# EAGLE board CC3000_WiFi_Breakout_Panel_v10 (EAGLE 6.5.0), part 1 of 3
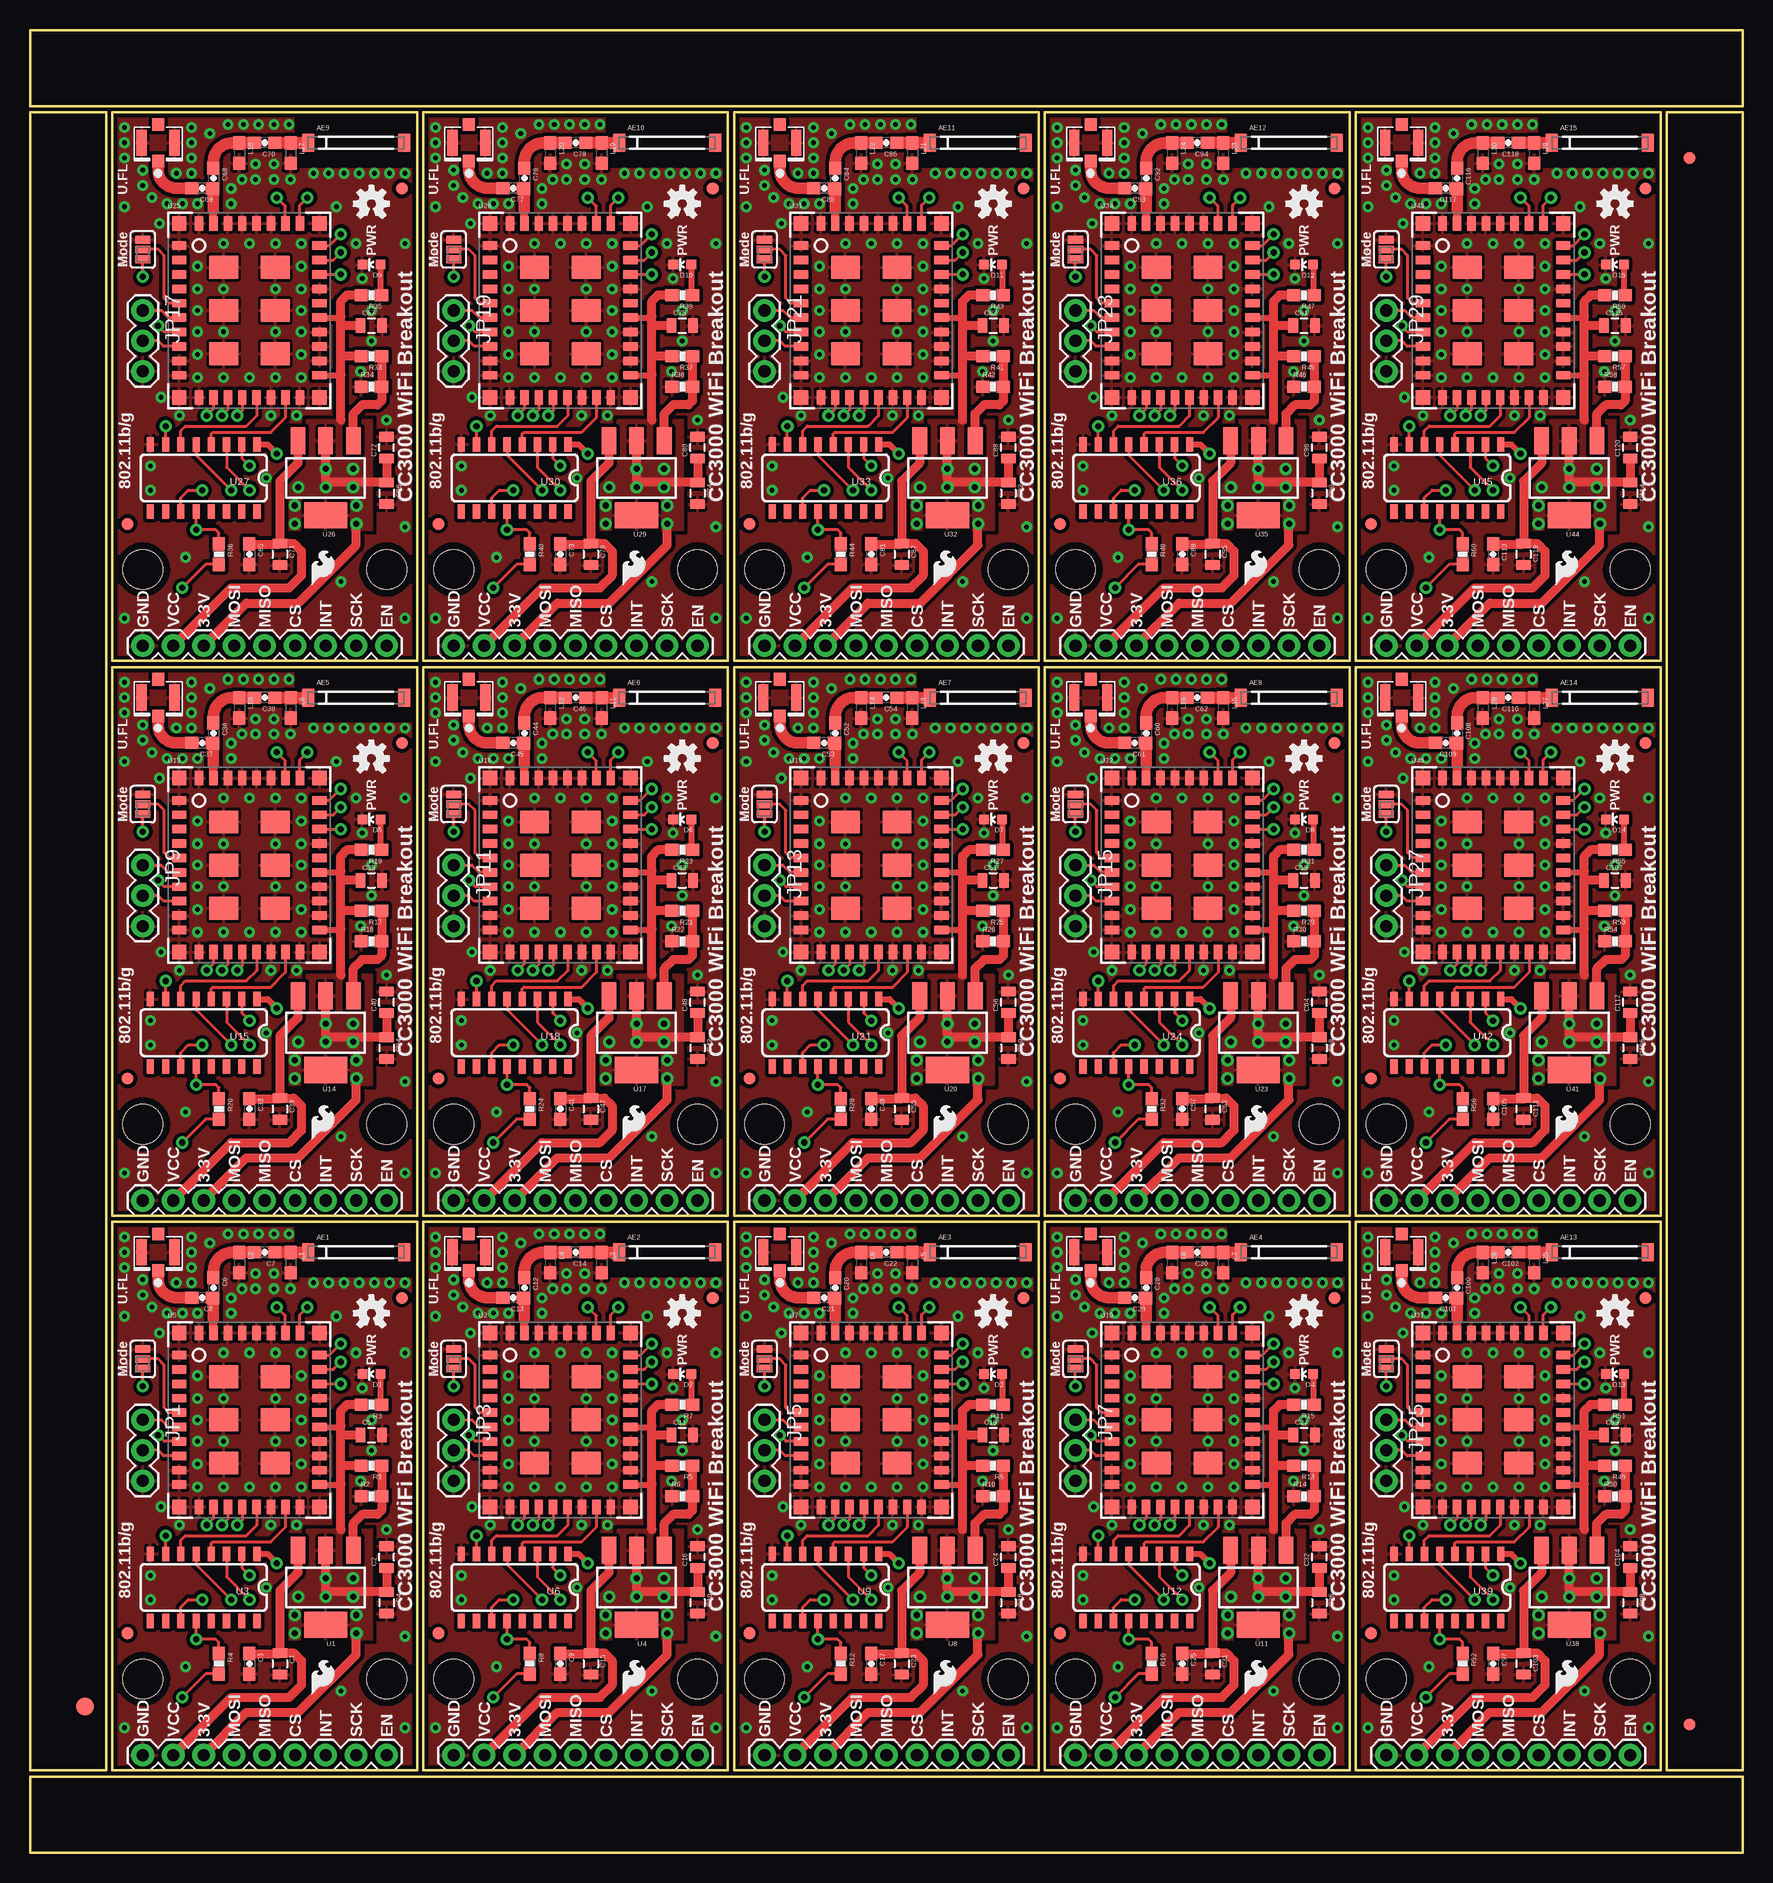
[diagram p0: board, top side]
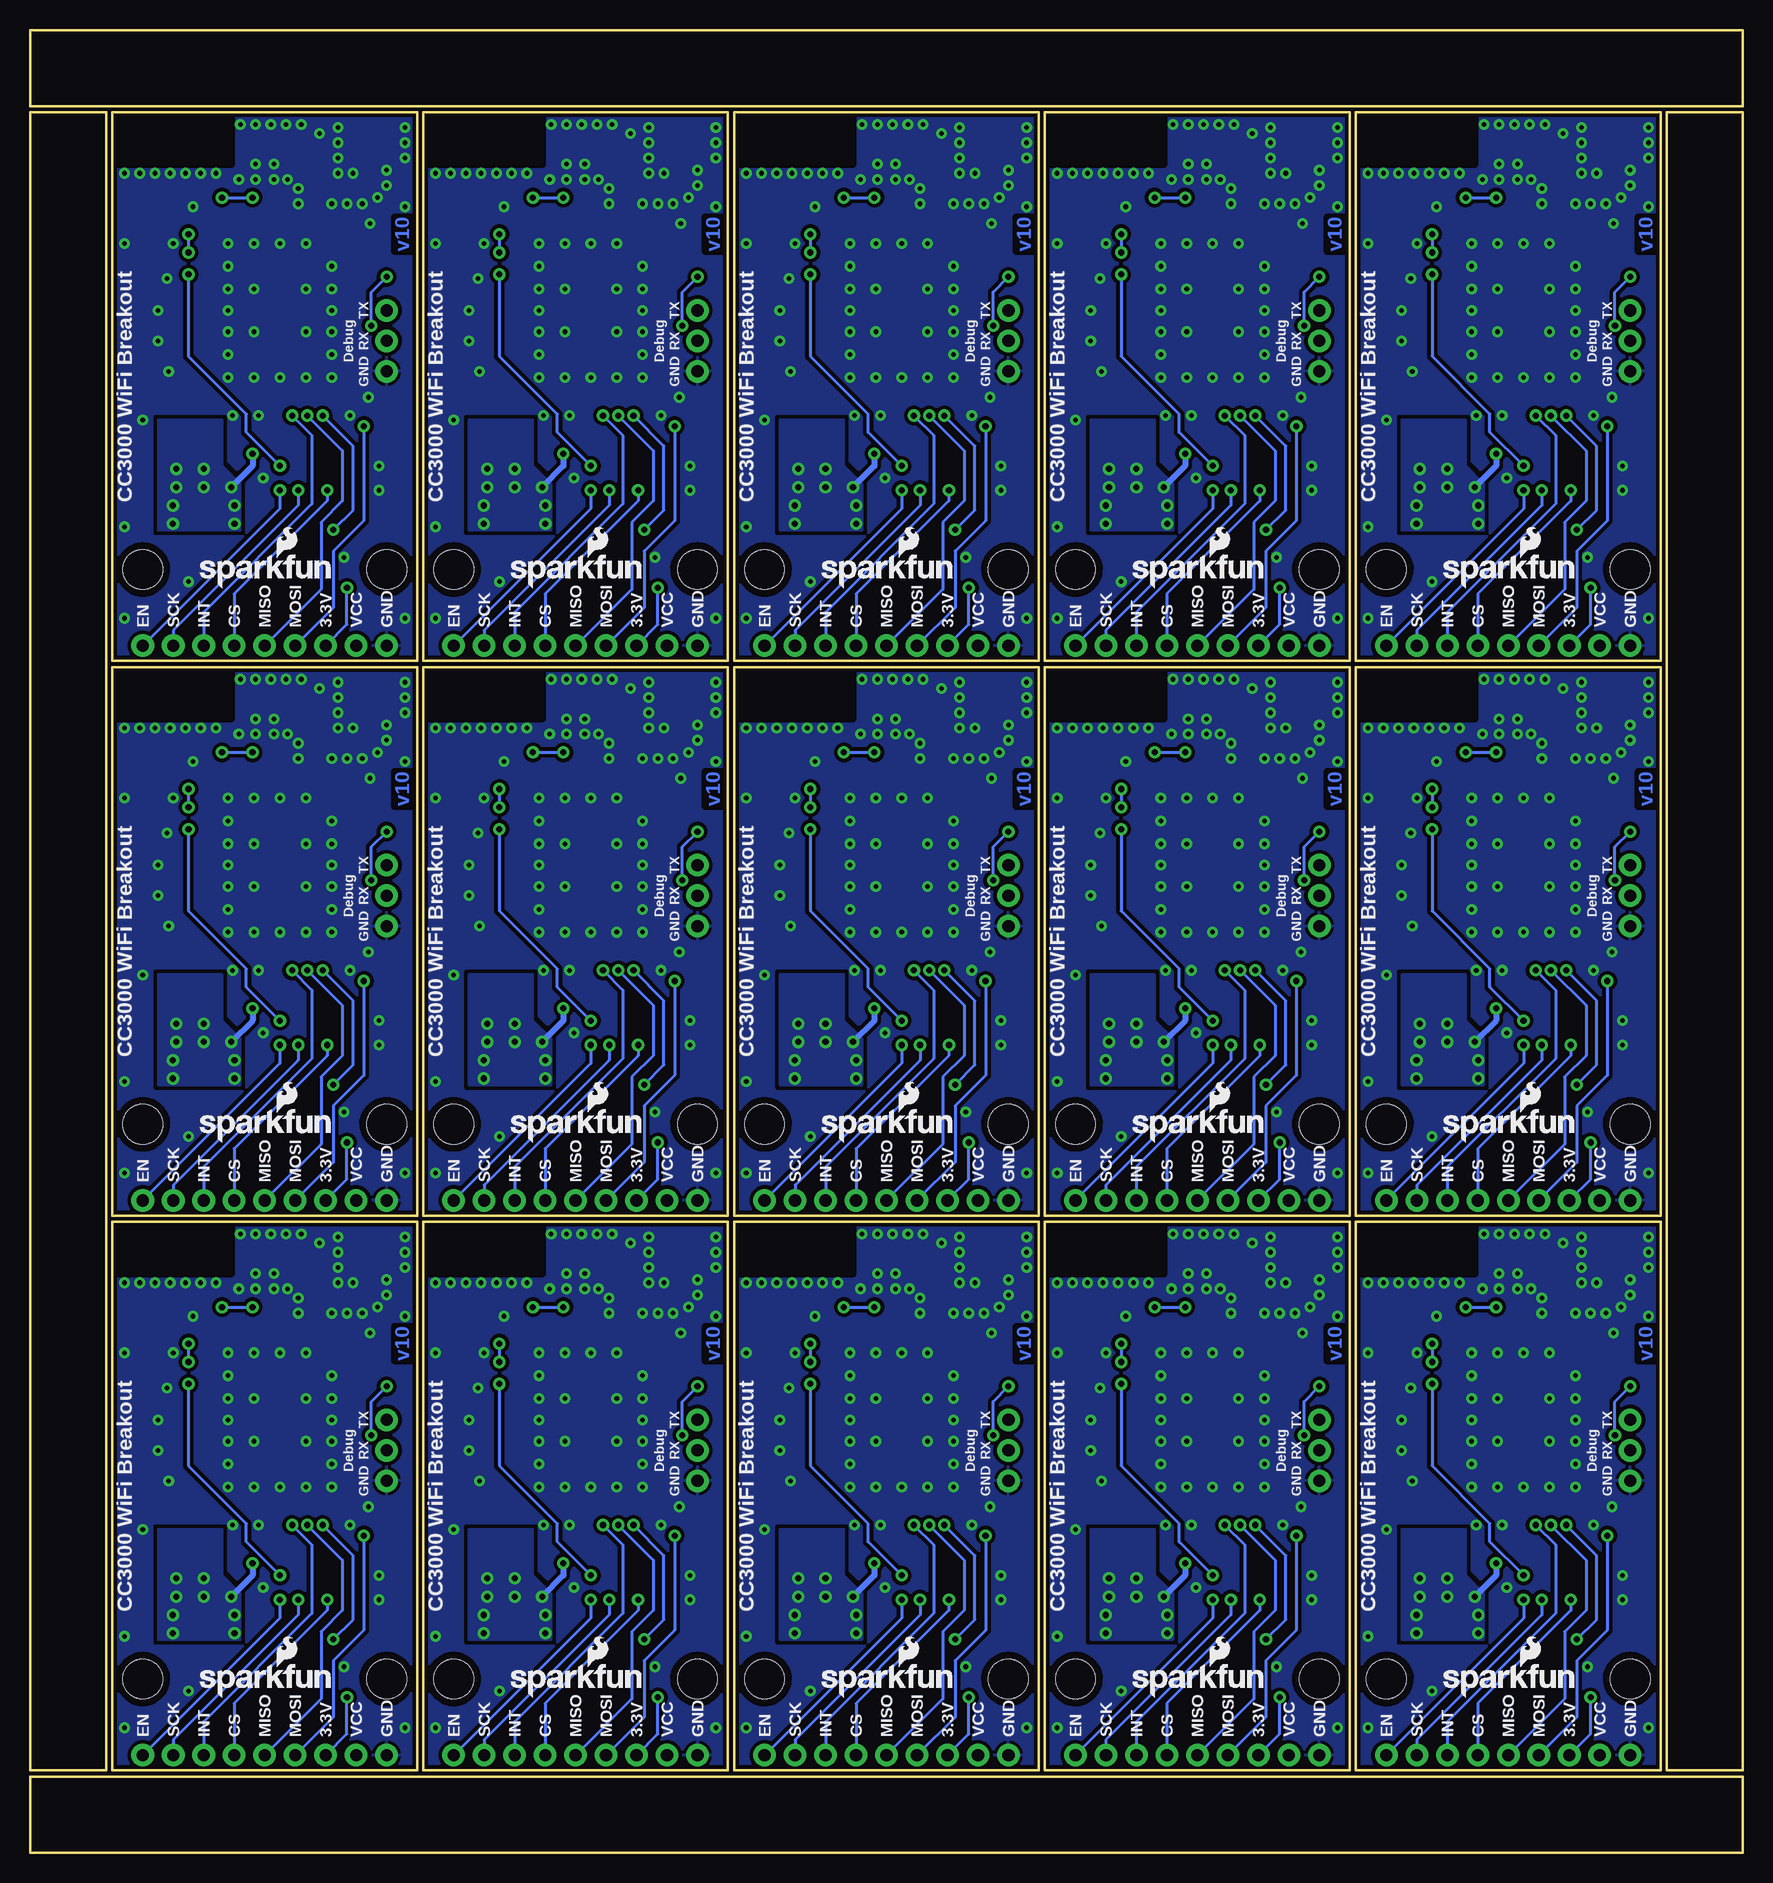
[diagram p1: board, bottom side, seen from below]

Size 142.75 x 151.89 mm. Coordinates in mm from the lower left corner, seen from the top.
Outline: 6.86,52.58 6.86,6.86 32.26,6.86 32.26,52.58 6.86,52.58
Outline: 32.77,52.58 32.77,6.86 58.17,6.86 58.17,52.58 32.77,52.58
Outline: 58.67,52.58 58.67,6.86 84.07,6.86 84.07,52.58 58.67,52.58
Outline: 84.58,52.58 84.58,6.86 109.98,6.86 109.98,52.58 84.58,52.58
Outline: 6.86,98.81 6.86,53.09 32.26,53.09 32.26,98.81 6.86,98.81
Outline: 32.77,98.81 32.77,53.09 58.17,53.09 58.17,98.81 32.77,98.81
Outline: 58.67,98.81 58.67,53.09 84.07,53.09 84.07,98.81 58.67,98.81
Outline: 84.58,98.81 84.58,53.09 109.98,53.09 109.98,98.81 84.58,98.81
Outline: 6.86,145.03 6.86,99.31 32.26,99.31 32.26,145.03 6.86,145.03
Outline: 32.77,145.03 32.77,99.31 58.17,99.31 58.17,145.03 32.77,145.03
Outline: 58.67,145.03 58.67,99.31 84.07,99.31 84.07,145.03 58.67,145.03
Outline: 84.58,145.03 84.58,99.31 109.98,99.31 109.98,145.03 84.58,145.03
Outline: 110.49,52.58 110.49,6.86 135.89,6.86 135.89,52.58 110.49,52.58
Outline: 110.49,98.81 110.49,53.09 135.89,53.09 135.89,98.81 110.49,98.81
Outline: 110.49,145.03 110.49,99.31 135.89,99.31 135.89,145.03 110.49,145.03
Outline: 6.35,6.86 6.35,145.03 0,145.03 0,6.86 6.35,6.86
Outline: 0,0 142.75,0 142.75,6.35 0,6.35 0,0
Outline: 142.75,6.86 142.75,145.03 136.4,145.03 136.4,6.86 142.75,6.86
Outline: 142.75,151.89 0,151.89 0,145.54 142.75,145.54 142.75,151.89
Copper layers (1*16): Top 0.035mm / dielectric 1.5mm / Bottom 0.035mm
Design rules "SparkFun-2-layer": minimum track width 7mil, minimum drill 15mil, track to track 8mil, track to pad 8mil, pad to pad 8mil, via to via 8mil, smd to smd 8mil, copper to edge 8mil, drill to drill 8mil, minimum pad ring 12mil, minimum via ring 10mil, stop-mask expansion 4mil, vias tented up to drill 20mil, thermal gap 10mil
tRestrict: area 22.4,48.3 to 32,52.6; area 48.3,48.3 to 57.9,52.6; area 74.2,48.3 to 83.8,52.6; area 100.1,48.3 to 109.7,52.6; area 22.4,94.5 to 32,98.8; area 48.3,94.5 to 57.9,98.8; area 74.2,94.5 to 83.8,98.8; area 100.1,94.5 to 109.7,98.8; area 22.4,140.7 to 32,145; area 48.3,140.7 to 57.9,145; area 74.2,140.7 to 83.8,145; area 100.1,140.7 to 109.7,145; area 126,48.3 to 135.6,52.6; area 126,94.5 to 135.6,98.8; area 126,140.7 to 135.6,145
bRestrict: area 22.4,48.3 to 32,52.6; area 48.3,48.3 to 57.9,52.6; area 74.2,48.3 to 83.8,52.6; area 100.1,48.3 to 109.7,52.6; area 22.4,94.5 to 32,98.8; area 48.3,94.5 to 57.9,98.8; area 74.2,94.5 to 83.8,98.8; area 100.1,94.5 to 109.7,98.8; area 22.4,140.7 to 32,145; area 48.3,140.7 to 57.9,145; area 74.2,140.7 to 83.8,145; area 100.1,140.7 to 109.7,145; area 126,48.3 to 135.6,52.6; area 126,94.5 to 135.6,98.8; area 126,140.7 to 135.6,145

## Footprints (pad centres in the part's own frame; a part is rotated, then mirrored left to right if it is on the bottom)
ANTENNA-CHIP_2500AT44M0400 = smd 1 x 1.5: FEED -4,0; NC 4,0
0805 = smd 0.8 x 1.2: 1 -0.9,0; 2 0.9,0
0603-CAP = smd 1.1 x 1: 1 -0.85,0; 2 0.85,0
LED-0603 = smd 0.8 x 0.8: A 0,-0.75; C 0,0.75
FIDUCIAL-1.5X3 = smd 1.5 x 1.5: 1 0,0
FIDUCIAL-1X2 = smd 1 x 1: 1 0,0
U.FL = smd 2.2 x 0.85: P$1 0,1.375; P$2 0,-1.375 | smd 1.05 x 1: P$3 1.525,0; P$4 -1.525,0
1X03 = drill 1.016 pad 1.88: 1 0,0; 2 2.54,0; 3 5.08,0
1X09 = drill 1.016 pad 1.88: 1 0,0; 2 2.54,0; 3 5.08,0; 4 7.62,0; 5 10.16,0; 6 12.7,0; 7 15.24,0; 8 17.78,0; 9 20.32,0
0603 = smd 1.1 x 1: 1 -0.85,0; 2 0.85,0
0603-RES = smd 1.1 x 1: 1 -0.85,0; 2 0.85,0
SJ_3_PASTE1&2 = smd 0.635 x 1.27: 1 -0.813,0; 2 0,0; 3 0.813,0
STAND-OFF = hole 3.302: 0,0
SOT223 = smd 1.219 x 2.235: 1 -2.311,-3.099; 2 0,-3.099; 3 2.311,-3.099 | smd 3.6 x 2.2: 4 0,3.099
QFN-46_CC3000 = smd 2.4 x 1.9: GND@37 -2.15,3.6; GND@38 -2.15,0; GND@39 -2.15,-3.6; GND@40 2.15,3.6; GND@41 2.15,0; GND@42 2.15,-3.6 | smd 1.2 x 1.2: GND@43 -5.85,7.25; GND@44 -5.85,-7.25; GND@45 5.85,-7.25; GND@46 5.85,7.25 | smd 1.2 x 0.7: P$1 -5.85,5.4; P$2 -5.85,4.2; P$3 -5.85,3; P$4 -5.85,1.8; P$5 -5.85,0.6; P$6 -5.85,-0.6; P$7 -5.85,-1.8; P$8 -5.85,-3; P$9 -5.85,-4.2; P$10 -5.85,-5.4; P$19 5.85,-5.4; P$20 5.85,-4.2; P$21 5.85,-3; P$22 5.85,-1.8; P$23 5.85,-0.6; P$24 5.85,0.6; P$25 5.85,1.8; P$26 5.85,3; P$27 5.85,4.2; P$28 5.85,5.4 | smd 0.7 x 1.2: P$11 -4.2,-7.25; P$12 -3,-7.25; P$13 -1.8,-7.25; P$14 -0.6,-7.25; P$15 0.6,-7.25; P$16 1.8,-7.25; P$17 3,-7.25; P$18 4.2,-7.25; P$29 4.2,7.25; P$30 3,7.25; P$31 1.8,7.25; P$32 0.6,7.25; P$33 -0.6,7.25; P$34 -1.8,7.25; P$35 -3,7.25; P$36 -4.2,7.25
SO016 = smd 0.6 x 1.2: 1 -4.445,-2.8; 2 -3.175,-2.8; 3 -1.905,-2.8; 4 -0.635,-2.8; 5 0.635,-2.8; 6 1.905,-2.8; 7 3.175,-2.8; 8 4.445,-2.8; 9 4.445,2.8; 10 3.175,2.8; 11 1.905,2.8; 12 0.635,2.8; 13 -0.635,2.8; 14 -1.905,2.8; 15 -3.175,2.8; 16 -4.445,2.8

## Placement (x,y rotation side)
AE1  ANTENNA22500AT44M0400  [ANTENNA-CHIP_2500AT44M0400]  27.18,50.04 0 top
AE2  ANTENNA22500AT44M0400  [ANTENNA-CHIP_2500AT44M0400]  53.09,50.04 0 top
AE3  ANTENNA22500AT44M0400  [ANTENNA-CHIP_2500AT44M0400]  78.99,50.04 0 top
AE4  ANTENNA22500AT44M0400  [ANTENNA-CHIP_2500AT44M0400]  104.9,50.04 0 top
AE5  ANTENNA22500AT44M0400  [ANTENNA-CHIP_2500AT44M0400]  27.18,96.27 0 top
AE6  ANTENNA22500AT44M0400  [ANTENNA-CHIP_2500AT44M0400]  53.09,96.27 0 top
AE7  ANTENNA22500AT44M0400  [ANTENNA-CHIP_2500AT44M0400]  78.99,96.27 0 top
AE8  ANTENNA22500AT44M0400  [ANTENNA-CHIP_2500AT44M0400]  104.9,96.27 0 top
AE9  ANTENNA22500AT44M0400  [ANTENNA-CHIP_2500AT44M0400]  27.18,142.49 0 top
AE10  ANTENNA22500AT44M0400  [ANTENNA-CHIP_2500AT44M0400]  53.09,142.49 0 top
AE11  ANTENNA22500AT44M0400  [ANTENNA-CHIP_2500AT44M0400]  78.99,142.49 0 top
AE12  ANTENNA22500AT44M0400  [ANTENNA-CHIP_2500AT44M0400]  104.9,142.49 0 top
AE13  ANTENNA22500AT44M0400  [ANTENNA-CHIP_2500AT44M0400]  130.81,50.04 0 top
AE14  ANTENNA22500AT44M0400  [ANTENNA-CHIP_2500AT44M0400]  130.81,96.27 0 top
AE15  ANTENNA22500AT44M0400  [ANTENNA-CHIP_2500AT44M0400]  130.81,142.49 0 top
C1  10uF  [0805]  20.83,15.75 270 top
C2  10uF  [0805]  29.72,24.64 90 top
C3  0.1uF  [0603-CAP]  18.29,15.75 270 top
C4  1uF  [0805]  29.72,20.83 270 top
C5  1uF  [0805]  28.45,34.8 0 top
C6  10pF  [0603-CAP]  15.29,47.07 270 top
C7  2.2pF  [0603-CAP]  19.56,50.04 180 top
C8  DNP  [0603-CAP]  14.35,46.25 180 top
C9  0.1uF  [0603-CAP]  44.2,15.75 270 top
C10  1uF  [0805]  55.63,20.83 270 top
C11  1uF  [0805]  54.36,34.8 0 top
C12  10pF  [0603-CAP]  41.2,47.07 270 top
C13  DNP  [0603-CAP]  40.26,46.25 180 top
C14  2.2pF  [0603-CAP]  45.47,50.04 180 top
C15  10uF  [0805]  46.74,15.75 270 top
C16  10uF  [0805]  55.63,24.64 90 top
C17  0.1uF  [0603-CAP]  70.1,15.75 270 top
C18  1uF  [0805]  81.53,20.83 270 top
C19  1uF  [0805]  80.26,34.8 0 top
C20  10pF  [0603-CAP]  67.11,47.07 270 top
C21  DNP  [0603-CAP]  66.17,46.25 180 top
C22  2.2pF  [0603-CAP]  71.37,50.04 180 top
C23  10uF  [0805]  72.64,15.75 270 top
C24  10uF  [0805]  81.53,24.64 90 top
C25  0.1uF  [0603-CAP]  96.01,15.75 270 top
C26  1uF  [0805]  107.44,20.83 270 top
C27  1uF  [0805]  106.17,34.8 0 top
C28  10pF  [0603-CAP]  93.01,47.07 270 top
C29  DNP  [0603-CAP]  92.08,46.25 180 top
C30  2.2pF  [0603-CAP]  97.28,50.04 180 top
C31  10uF  [0805]  98.55,15.75 270 top
C32  10uF  [0805]  107.44,24.64 90 top
C33  0.1uF  [0603-CAP]  18.29,61.98 270 top
C34  1uF  [0805]  29.72,67.06 270 top
C35  1uF  [0805]  28.45,81.03 0 top
C36  10pF  [0603-CAP]  15.29,93.29 270 top
C37  DNP  [0603-CAP]  14.35,92.48 180 top
C38  2.2pF  [0603-CAP]  19.56,96.27 180 top
C39  10uF  [0805]  20.83,61.98 270 top
C40  10uF  [0805]  29.72,70.87 90 top
C41  0.1uF  [0603-CAP]  44.2,61.98 270 top
C42  1uF  [0805]  55.63,67.06 270 top
C43  1uF  [0805]  54.36,81.03 0 top
C44  10pF  [0603-CAP]  41.2,93.29 270 top
C45  DNP  [0603-CAP]  40.26,92.48 180 top
C46  2.2pF  [0603-CAP]  45.47,96.27 180 top
C47  10uF  [0805]  46.74,61.98 270 top
C48  10uF  [0805]  55.63,70.87 90 top
C49  0.1uF  [0603-CAP]  70.1,61.98 270 top
C50  1uF  [0805]  81.53,67.06 270 top
C51  1uF  [0805]  80.26,81.03 0 top
C52  10pF  [0603-CAP]  67.11,93.29 270 top
C53  DNP  [0603-CAP]  66.17,92.48 180 top
C54  2.2pF  [0603-CAP]  71.37,96.27 180 top
C55  10uF  [0805]  72.64,61.98 270 top
C56  10uF  [0805]  81.53,70.87 90 top
C57  0.1uF  [0603-CAP]  96.01,61.98 270 top
C58  1uF  [0805]  107.44,67.06 270 top
C59  1uF  [0805]  106.17,81.03 0 top
C60  10pF  [0603-CAP]  93.01,93.29 270 top
C61  DNP  [0603-CAP]  92.08,92.48 180 top
C62  2.2pF  [0603-CAP]  97.28,96.27 180 top
C63  10uF  [0805]  98.55,61.98 270 top
C64  10uF  [0805]  107.44,70.87 90 top
C65  0.1uF  [0603-CAP]  18.29,108.2 270 top
C66  1uF  [0805]  29.72,113.28 270 top
C67  1uF  [0805]  28.45,127.25 0 top
C68  10pF  [0603-CAP]  15.29,139.52 270 top
C69  DNP  [0603-CAP]  14.35,138.71 180 top
C70  2.2pF  [0603-CAP]  19.56,142.49 180 top
C71  10uF  [0805]  20.83,108.2 270 top
C72  10uF  [0805]  29.72,117.09 90 top
C73  0.1uF  [0603-CAP]  44.2,108.2 270 top
C74  1uF  [0805]  55.63,113.28 270 top
C75  1uF  [0805]  54.36,127.25 0 top
C76  10pF  [0603-CAP]  41.2,139.52 270 top
C77  DNP  [0603-CAP]  40.26,138.71 180 top
C78  2.2pF  [0603-CAP]  45.47,142.49 180 top
C79  10uF  [0805]  46.74,108.2 270 top
C80  10uF  [0805]  55.63,117.09 90 top
C81  0.1uF  [0603-CAP]  70.1,108.2 270 top
C82  1uF  [0805]  81.53,113.28 270 top
C83  1uF  [0805]  80.26,127.25 0 top
C84  10pF  [0603-CAP]  67.11,139.52 270 top
C85  DNP  [0603-CAP]  66.17,138.71 180 top
C86  2.2pF  [0603-CAP]  71.37,142.49 180 top
C87  10uF  [0805]  72.64,108.2 270 top
C88  10uF  [0805]  81.53,117.09 90 top
C89  0.1uF  [0603-CAP]  96.01,108.2 270 top
C90  1uF  [0805]  107.44,113.28 270 top
C91  1uF  [0805]  106.17,127.25 0 top
C92  10pF  [0603-CAP]  93.01,139.52 270 top
C93  DNP  [0603-CAP]  92.08,138.71 180 top
C94  2.2pF  [0603-CAP]  97.28,142.49 180 top
C95  10uF  [0805]  98.55,108.2 270 top
C96  10uF  [0805]  107.44,117.09 90 top
C97  0.1uF  [0603-CAP]  121.92,15.75 270 top
C98  1uF  [0805]  133.35,20.83 270 top
C99  1uF  [0805]  132.08,34.8 0 top
C100  10pF  [0603-CAP]  118.92,47.07 270 top
C101  DNP  [0603-CAP]  117.98,46.25 180 top
C102  2.2pF  [0603-CAP]  123.19,50.04 180 top
C103  10uF  [0805]  124.46,15.75 270 top
C104  10uF  [0805]  133.35,24.64 90 top
C105  0.1uF  [0603-CAP]  121.92,61.98 270 top
C106  1uF  [0805]  133.35,67.06 270 top
C107  1uF  [0805]  132.08,81.03 0 top
C108  10pF  [0603-CAP]  118.92,93.29 270 top
C109  DNP  [0603-CAP]  117.98,92.48 180 top
C110  2.2pF  [0603-CAP]  123.19,96.27 180 top
C111  10uF  [0805]  124.46,61.98 270 top
C112  10uF  [0805]  133.35,70.87 90 top
C113  0.1uF  [0603-CAP]  121.92,108.2 270 top
C114  1uF  [0805]  133.35,113.28 270 top
C115  1uF  [0805]  132.08,127.25 0 top
C116  10pF  [0603-CAP]  118.92,139.52 270 top
C117  DNP  [0603-CAP]  117.98,138.71 180 top
C118  2.2pF  [0603-CAP]  123.19,142.49 180 top
C119  10uF  [0805]  124.46,108.2 270 top
C120  10uF  [0805]  133.35,117.09 90 top
D1  GREEN  [LED-0603]  28.45,39.88 90 top
D2  GREEN  [LED-0603]  54.36,39.88 90 top
D3  GREEN  [LED-0603]  80.26,39.88 90 top
D4  GREEN  [LED-0603]  106.17,39.88 90 top
D5  GREEN  [LED-0603]  28.45,86.11 90 top
D6  GREEN  [LED-0603]  54.36,86.11 90 top
D7  GREEN  [LED-0603]  80.26,86.11 90 top
D8  GREEN  [LED-0603]  106.17,86.11 90 top
D9  GREEN  [LED-0603]  28.45,132.33 90 top
D10  GREEN  [LED-0603]  54.36,132.33 90 top
D11  GREEN  [LED-0603]  80.26,132.33 90 top
D12  GREEN  [LED-0603]  106.17,132.33 90 top
D13  GREEN  [LED-0603]  132.08,39.88 90 top
D14  GREEN  [LED-0603]  132.08,86.11 90 top
D15  GREEN  [LED-0603]  132.08,132.33 90 top
E$1  [FIDUCIAL-1.5X3]  4.57,12.19 0 top
E$4  [FIDUCIAL-1X2]  138.3,10.67 0 top
E$6  [FIDUCIAL-1X2]  138.3,141.22 180 top
FID1  FIDUCIAL1X2  [FIDUCIAL-1X2]  30.99,46.23 0 top
FID2  FIDUCIAL1X2  [FIDUCIAL-1X2]  8.13,18.29 0 top
FID3  FIDUCIAL1X2  [FIDUCIAL-1X2]  56.9,46.23 0 top
FID4  FIDUCIAL1X2  [FIDUCIAL-1X2]  34.04,18.29 0 top
FID5  FIDUCIAL1X2  [FIDUCIAL-1X2]  82.8,46.23 0 top
FID6  FIDUCIAL1X2  [FIDUCIAL-1X2]  59.94,18.29 0 top
FID7  FIDUCIAL1X2  [FIDUCIAL-1X2]  108.71,46.23 0 top
FID8  FIDUCIAL1X2  [FIDUCIAL-1X2]  85.85,18.29 0 top
FID9  FIDUCIAL1X2  [FIDUCIAL-1X2]  30.99,92.46 0 top
FID10  FIDUCIAL1X2  [FIDUCIAL-1X2]  8.13,64.52 0 top
FID11  FIDUCIAL1X2  [FIDUCIAL-1X2]  56.9,92.46 0 top
FID12  FIDUCIAL1X2  [FIDUCIAL-1X2]  34.04,64.52 0 top
FID13  FIDUCIAL1X2  [FIDUCIAL-1X2]  82.8,92.46 0 top
FID14  FIDUCIAL1X2  [FIDUCIAL-1X2]  59.94,64.52 0 top
FID15  FIDUCIAL1X2  [FIDUCIAL-1X2]  108.71,92.46 0 top
FID16  FIDUCIAL1X2  [FIDUCIAL-1X2]  85.85,64.52 0 top
FID17  FIDUCIAL1X2  [FIDUCIAL-1X2]  30.99,138.68 0 top
FID18  FIDUCIAL1X2  [FIDUCIAL-1X2]  8.13,110.74 0 top
FID19  FIDUCIAL1X2  [FIDUCIAL-1X2]  56.9,138.68 0 top
FID20  FIDUCIAL1X2  [FIDUCIAL-1X2]  34.04,110.74 0 top
FID21  FIDUCIAL1X2  [FIDUCIAL-1X2]  82.8,138.68 0 top
FID22  FIDUCIAL1X2  [FIDUCIAL-1X2]  59.94,110.74 0 top
FID23  FIDUCIAL1X2  [FIDUCIAL-1X2]  108.71,138.68 0 top
FID24  FIDUCIAL1X2  [FIDUCIAL-1X2]  85.85,110.74 0 top
FID25  FIDUCIAL1X2  [FIDUCIAL-1X2]  134.62,46.23 0 top
FID26  FIDUCIAL1X2  [FIDUCIAL-1X2]  111.76,18.29 0 top
FID27  FIDUCIAL1X2  [FIDUCIAL-1X2]  134.62,92.46 0 top
FID28  FIDUCIAL1X2  [FIDUCIAL-1X2]  111.76,64.52 0 top
FID29  FIDUCIAL1X2  [FIDUCIAL-1X2]  134.62,138.68 0 top
FID30  FIDUCIAL1X2  [FIDUCIAL-1X2]  111.76,110.74 0 top
J1  U.FL  [U.FL]  10.67,50.04 270 top
J2  U.FL  [U.FL]  36.58,50.04 270 top
J3  U.FL  [U.FL]  62.48,50.04 270 top
J4  U.FL  [U.FL]  88.39,50.04 270 top
J5  U.FL  [U.FL]  10.67,96.27 270 top
J6  U.FL  [U.FL]  36.58,96.27 270 top
J7  U.FL  [U.FL]  62.48,96.27 270 top
J8  U.FL  [U.FL]  88.39,96.27 270 top
J9  U.FL  [U.FL]  10.67,142.49 270 top
J10  U.FL  [U.FL]  36.58,142.49 270 top
J11  U.FL  [U.FL]  62.48,142.49 270 top
J12  U.FL  [U.FL]  88.39,142.49 270 top
J13  U.FL  [U.FL]  114.3,50.04 270 top
J14  U.FL  [U.FL]  114.3,96.27 270 top
J15  U.FL  [U.FL]  114.3,142.49 270 top
JP1  Debug  [1X03]  9.4,36.07 270 top
JP2  M09  [1X09]  29.72,8.13 180 top
JP3  Debug  [1X03]  35.31,36.07 270 top
JP4  M09  [1X09]  55.63,8.13 180 top
JP5  Debug  [1X03]  61.21,36.07 270 top
JP6  M09  [1X09]  81.53,8.13 180 top
JP7  Debug  [1X03]  87.12,36.07 270 top
JP8  M09  [1X09]  107.44,8.13 180 top
JP9  Debug  [1X03]  9.4,82.3 270 top
JP10  M09  [1X09]  29.72,54.36 180 top
JP11  Debug  [1X03]  35.31,82.3 270 top
JP12  M09  [1X09]  55.63,54.36 180 top
JP13  Debug  [1X03]  61.21,82.3 270 top
JP14  M09  [1X09]  81.53,54.36 180 top
JP15  Debug  [1X03]  87.12,82.3 270 top
JP16  M09  [1X09]  107.44,54.36 180 top
JP17  Debug  [1X03]  9.4,128.52 270 top
JP18  M09  [1X09]  29.72,100.58 180 top
JP19  Debug  [1X03]  35.31,128.52 270 top
JP20  M09  [1X09]  55.63,100.58 180 top
JP21  Debug  [1X03]  61.21,128.52 270 top
JP22  M09  [1X09]  81.53,100.58 180 top
JP23  Debug  [1X03]  87.12,128.52 270 top
JP24  M09  [1X09]  107.44,100.58 180 top
JP25  Debug  [1X03]  113.03,36.07 270 top
JP26  M09  [1X09]  133.35,8.13 180 top
JP27  Debug  [1X03]  113.03,82.3 270 top
JP28  M09  [1X09]  133.35,54.36 180 top
JP29  Debug  [1X03]  113.03,128.52 270 top
JP30  M09  [1X09]  133.35,100.58 180 top
L1  DNP  [0603]  21.72,49.17 270 top
L2  2.2nH  [0603]  17.45,49.17 270 top
L3  DNP  [0603]  47.62,49.17 270 top
L4  2.2nH  [0603]  43.36,49.17 270 top
L5  DNP  [0603]  73.53,49.17 270 top
L6  2.2nH  [0603]  69.27,49.17 270 top
L7  DNP  [0603]  99.44,49.17 270 top
L8  2.2nH  [0603]  95.17,49.17 270 top
L9  DNP  [0603]  21.72,95.4 270 top
L10  2.2nH  [0603]  17.45,95.4 270 top
L11  DNP  [0603]  47.62,95.4 270 top
L12  2.2nH  [0603]  43.36,95.4 270 top
L13  DNP  [0603]  73.53,95.4 270 top
L14  2.2nH  [0603]  69.27,95.4 270 top
L15  DNP  [0603]  99.44,95.4 270 top
L16  2.2nH  [0603]  95.17,95.4 270 top
L17  DNP  [0603]  21.72,141.63 270 top
L18  2.2nH  [0603]  17.45,141.63 270 top
L19  DNP  [0603]  47.62,141.63 270 top
L20  2.2nH  [0603]  43.36,141.63 270 top
L21  DNP  [0603]  73.53,141.63 270 top
L22  2.2nH  [0603]  69.27,141.63 270 top
L23  DNP  [0603]  99.44,141.63 270 top
L24  2.2nH  [0603]  95.17,141.63 270 top
L25  DNP  [0603]  125.35,49.17 270 top
L26  2.2nH  [0603]  121.08,49.17 270 top
L27  DNP  [0603]  125.35,95.4 270 top
L28  2.2nH  [0603]  121.08,95.4 270 top
L29  DNP  [0603]  125.35,141.63 270 top
L30  2.2nH  [0603]  121.08,141.63 270 top
LOGO1  OSHW-LOGOS  [OSHW-LOGO-S]  28.45,44.96 0 top
LOGO2  OSHW-LOGOS  [OSHW-LOGO-S]  54.36,44.96 0 top
LOGO3  LOGO-SFESK  [SFE-LOGO-FLAME]  23.5,13.21 0 top
LOGO4  SFE_LOGO_NAME_FLAME.1_INCH  [SFE_LOGO_NAME_FLAME_.1]  25.4,12.83 0 bottom
LOGO5  LOGO-SFESK  [SFE-LOGO-FLAME]  49.4,13.21 0 top
LOGO6  SFE_LOGO_NAME_FLAME.1_INCH  [SFE_LOGO_NAME_FLAME_.1]  51.31,12.83 0 bottom
LOGO7  OSHW-LOGOS  [OSHW-LOGO-S]  80.26,44.96 0 top
LOGO8  LOGO-SFESK  [SFE-LOGO-FLAME]  75.31,13.21 0 top
LOGO9  SFE_LOGO_NAME_FLAME.1_INCH  [SFE_LOGO_NAME_FLAME_.1]  77.22,12.83 0 bottom
LOGO10  OSHW-LOGOS  [OSHW-LOGO-S]  106.17,44.96 0 top
LOGO11  LOGO-SFESK  [SFE-LOGO-FLAME]  101.22,13.21 0 top
LOGO12  SFE_LOGO_NAME_FLAME.1_INCH  [SFE_LOGO_NAME_FLAME_.1]  103.12,12.83 0 bottom
LOGO13  OSHW-LOGOS  [OSHW-LOGO-S]  28.45,91.19 0 top
LOGO14  LOGO-SFESK  [SFE-LOGO-FLAME]  23.5,59.44 0 top
LOGO15  SFE_LOGO_NAME_FLAME.1_INCH  [SFE_LOGO_NAME_FLAME_.1]  25.4,59.05 0 bottom
LOGO16  OSHW-LOGOS  [OSHW-LOGO-S]  54.36,91.19 0 top
LOGO17  LOGO-SFESK  [SFE-LOGO-FLAME]  49.4,59.44 0 top
LOGO18  SFE_LOGO_NAME_FLAME.1_INCH  [SFE_LOGO_NAME_FLAME_.1]  51.31,59.05 0 bottom
LOGO19  OSHW-LOGOS  [OSHW-LOGO-S]  80.26,91.19 0 top
LOGO20  LOGO-SFESK  [SFE-LOGO-FLAME]  75.31,59.44 0 top
LOGO21  SFE_LOGO_NAME_FLAME.1_INCH  [SFE_LOGO_NAME_FLAME_.1]  77.22,59.05 0 bottom
LOGO22  OSHW-LOGOS  [OSHW-LOGO-S]  106.17,91.19 0 top
LOGO23  LOGO-SFESK  [SFE-LOGO-FLAME]  101.22,59.44 0 top
LOGO24  SFE_LOGO_NAME_FLAME.1_INCH  [SFE_LOGO_NAME_FLAME_.1]  103.12,59.05 0 bottom
LOGO25  OSHW-LOGOS  [OSHW-LOGO-S]  28.45,137.41 0 top
LOGO26  LOGO-SFESK  [SFE-LOGO-FLAME]  23.5,105.66 0 top
LOGO27  SFE_LOGO_NAME_FLAME.1_INCH  [SFE_LOGO_NAME_FLAME_.1]  25.4,105.28 0 bottom
LOGO28  OSHW-LOGOS  [OSHW-LOGO-S]  54.36,137.41 0 top
LOGO29  LOGO-SFESK  [SFE-LOGO-FLAME]  49.4,105.66 0 top
LOGO30  SFE_LOGO_NAME_FLAME.1_INCH  [SFE_LOGO_NAME_FLAME_.1]  51.31,105.28 0 bottom
LOGO31  OSHW-LOGOS  [OSHW-LOGO-S]  80.26,137.41 0 top
LOGO32  LOGO-SFESK  [SFE-LOGO-FLAME]  75.31,105.66 0 top
LOGO33  SFE_LOGO_NAME_FLAME.1_INCH  [SFE_LOGO_NAME_FLAME_.1]  77.22,105.28 0 bottom
LOGO34  OSHW-LOGOS  [OSHW-LOGO-S]  106.17,137.41 0 top
LOGO35  LOGO-SFESK  [SFE-LOGO-FLAME]  101.22,105.66 0 top
LOGO36  SFE_LOGO_NAME_FLAME.1_INCH  [SFE_LOGO_NAME_FLAME_.1]  103.12,105.28 0 bottom
LOGO37  OSHW-LOGOS  [OSHW-LOGO-S]  132.08,44.96 0 top
LOGO38  LOGO-SFESK  [SFE-LOGO-FLAME]  127.13,13.21 0 top
LOGO39  SFE_LOGO_NAME_FLAME.1_INCH  [SFE_LOGO_NAME_FLAME_.1]  129.03,12.83 0 bottom
LOGO40  OSHW-LOGOS  [OSHW-LOGO-S]  132.08,91.19 0 top
LOGO41  LOGO-SFESK  [SFE-LOGO-FLAME]  127.13,59.44 0 top
LOGO42  SFE_LOGO_NAME_FLAME.1_INCH  [SFE_LOGO_NAME_FLAME_.1]  129.03,59.05 0 bottom
LOGO43  OSHW-LOGOS  [OSHW-LOGO-S]  132.08,137.41 0 top
LOGO44  LOGO-SFESK  [SFE-LOGO-FLAME]  127.13,105.66 0 top
LOGO45  SFE_LOGO_NAME_FLAME.1_INCH  [SFE_LOGO_NAME_FLAME_.1]  129.03,105.28 0 bottom
R1  240  [0603-RES]  28.45,32.26 180 top
R2  390  [0603-RES]  28.45,29.72 0 top
R3  390  [0603-RES]  28.45,37.34 180 top
R4  10k  [0603-RES]  15.75,15.75 270 top
R5  240  [0603-RES]  54.36,32.26 180 top
R6  390  [0603-RES]  54.36,29.72 0 top
R7  390  [0603-RES]  54.36,37.34 180 top
R8  10k  [0603-RES]  41.66,15.75 270 top
R9  240  [0603-RES]  80.26,32.26 180 top
R10  390  [0603-RES]  80.26,29.72 0 top
R11  390  [0603-RES]  80.26,37.34 180 top
R12  10k  [0603-RES]  67.56,15.75 270 top
R13  240  [0603-RES]  106.17,32.26 180 top
R14  390  [0603-RES]  106.17,29.72 0 top
R15  390  [0603-RES]  106.17,37.34 180 top
R16  10k  [0603-RES]  93.47,15.75 270 top
R17  240  [0603-RES]  28.45,78.49 180 top
R18  390  [0603-RES]  28.45,75.95 0 top
R19  390  [0603-RES]  28.45,83.57 180 top
R20  10k  [0603-RES]  15.75,61.98 270 top
R21  240  [0603-RES]  54.36,78.49 180 top
R22  390  [0603-RES]  54.36,75.95 0 top
R23  390  [0603-RES]  54.36,83.57 180 top
R24  10k  [0603-RES]  41.66,61.98 270 top
R25  240  [0603-RES]  80.26,78.49 180 top
R26  390  [0603-RES]  80.26,75.95 0 top
R27  390  [0603-RES]  80.26,83.57 180 top
R28  10k  [0603-RES]  67.56,61.98 270 top
R29  240  [0603-RES]  106.17,78.49 180 top
R30  390  [0603-RES]  106.17,75.95 0 top
R31  390  [0603-RES]  106.17,83.57 180 top
R32  10k  [0603-RES]  93.47,61.98 270 top
R33  240  [0603-RES]  28.45,124.71 180 top
R34  390  [0603-RES]  28.45,122.17 0 top
R35  390  [0603-RES]  28.45,129.79 180 top
R36  10k  [0603-RES]  15.75,108.2 270 top
R37  240  [0603-RES]  54.36,124.71 180 top
R38  390  [0603-RES]  54.36,122.17 0 top
R39  390  [0603-RES]  54.36,129.79 180 top
R40  10k  [0603-RES]  41.66,108.2 270 top
R41  240  [0603-RES]  80.26,124.71 180 top
R42  390  [0603-RES]  80.26,122.17 0 top
R43  390  [0603-RES]  80.26,129.79 180 top
R44  10k  [0603-RES]  67.56,108.2 270 top
R45  240  [0603-RES]  106.17,124.71 180 top
R46  390  [0603-RES]  106.17,122.17 0 top
R47  390  [0603-RES]  106.17,129.79 180 top
R48  10k  [0603-RES]  93.47,108.2 270 top
R49  240  [0603-RES]  132.08,32.26 180 top
R50  390  [0603-RES]  132.08,29.72 0 top
R51  390  [0603-RES]  132.08,37.34 180 top
R52  10k  [0603-RES]  119.38,15.75 270 top
R53  240  [0603-RES]  132.08,78.49 180 top
R54  390  [0603-RES]  132.08,75.95 0 top
R55  390  [0603-RES]  132.08,83.57 180 top
R56  10k  [0603-RES]  119.38,61.98 270 top
R57  240  [0603-RES]  132.08,124.71 180 top
R58  390  [0603-RES]  132.08,122.17 0 top
R59  390  [0603-RES]  132.08,129.79 180 top
R60  10k  [0603-RES]  119.38,108.2 270 top
SJ1  Mode  [SJ_3_PASTE1&2]  9.4,41.15 90 top
SJ2  Mode  [SJ_3_PASTE1&2]  35.31,41.15 90 top
SJ3  Mode  [SJ_3_PASTE1&2]  61.21,41.15 90 top
SJ4  Mode  [SJ_3_PASTE1&2]  87.12,41.15 90 top
SJ5  Mode  [SJ_3_PASTE1&2]  9.4,87.38 90 top
SJ6  Mode  [SJ_3_PASTE1&2]  35.31,87.38 90 top
SJ7  Mode  [SJ_3_PASTE1&2]  61.21,87.38 90 top
SJ8  Mode  [SJ_3_PASTE1&2]  87.12,87.38 90 top
SJ9  Mode  [SJ_3_PASTE1&2]  9.4,133.6 90 top
SJ10  Mode  [SJ_3_PASTE1&2]  35.31,133.6 90 top
SJ11  Mode  [SJ_3_PASTE1&2]  61.21,133.6 90 top
SJ12  Mode  [SJ_3_PASTE1&2]  87.12,133.6 90 top
SJ13  Mode  [SJ_3_PASTE1&2]  113.03,41.15 90 top
SJ14  Mode  [SJ_3_PASTE1&2]  113.03,87.38 90 top
SJ15  Mode  [SJ_3_PASTE1&2]  113.03,133.6 90 top
STANDOFF1  STAND-OFF  [STAND-OFF]  29.72,14.48 90 top
STANDOFF2  STAND-OFF  [STAND-OFF]  9.4,14.48 90 top
STANDOFF3  STAND-OFF  [STAND-OFF]  55.63,14.48 90 top
STANDOFF4  STAND-OFF  [STAND-OFF]  35.31,14.48 90 top
STANDOFF5  STAND-OFF  [STAND-OFF]  81.53,14.48 90 top
STANDOFF6  STAND-OFF  [STAND-OFF]  61.21,14.48 90 top
STANDOFF7  STAND-OFF  [STAND-OFF]  107.44,14.48 90 top
STANDOFF8  STAND-OFF  [STAND-OFF]  87.12,14.48 90 top
STANDOFF9  STAND-OFF  [STAND-OFF]  29.72,60.71 90 top
STANDOFF10  STAND-OFF  [STAND-OFF]  9.4,60.71 90 top
STANDOFF11  STAND-OFF  [STAND-OFF]  55.63,60.71 90 top
STANDOFF12  STAND-OFF  [STAND-OFF]  35.31,60.71 90 top
STANDOFF13  STAND-OFF  [STAND-OFF]  81.53,60.71 90 top
STANDOFF14  STAND-OFF  [STAND-OFF]  61.21,60.71 90 top
STANDOFF15  STAND-OFF  [STAND-OFF]  107.44,60.71 90 top
STANDOFF16  STAND-OFF  [STAND-OFF]  87.12,60.71 90 top
STANDOFF17  STAND-OFF  [STAND-OFF]  29.72,106.93 90 top
STANDOFF18  STAND-OFF  [STAND-OFF]  9.4,106.93 90 top
STANDOFF19  STAND-OFF  [STAND-OFF]  55.63,106.93 90 top
STANDOFF20  STAND-OFF  [STAND-OFF]  35.31,106.93 90 top
STANDOFF21  STAND-OFF  [STAND-OFF]  81.53,106.93 90 top
STANDOFF22  STAND-OFF  [STAND-OFF]  61.21,106.93 90 top
STANDOFF23  STAND-OFF  [STAND-OFF]  107.44,106.93 90 top
STANDOFF24  STAND-OFF  [STAND-OFF]  87.12,106.93 90 top
STANDOFF25  STAND-OFF  [STAND-OFF]  133.35,14.48 90 top
STANDOFF26  STAND-OFF  [STAND-OFF]  113.03,14.48 90 top
STANDOFF27  STAND-OFF  [STAND-OFF]  133.35,60.71 90 top
STANDOFF28  STAND-OFF  [STAND-OFF]  113.03,60.71 90 top
STANDOFF29  STAND-OFF  [STAND-OFF]  133.35,106.93 90 top
STANDOFF30  STAND-OFF  [STAND-OFF]  113.03,106.93 90 top
U1  LM1117  [SOT223]  24.64,22.1 180 top
U2  CC3000  [QFN-46_CC3000]  44.2,36.07 0 top
U3  74HC4050  [SO016]  14.48,22.1 180 top
U4  LM1117  [SOT223]  50.55,22.1 180 top
U5  CC3000  [QFN-46_CC3000]  18.29,36.07 0 top
U6  74HC4050  [SO016]  40.39,22.1 180 top
U7  CC3000  [QFN-46_CC3000]  70.1,36.07 0 top
U8  LM1117  [SOT223]  76.45,22.1 180 top
U9  74HC4050  [SO016]  66.29,22.1 180 top
U10  CC3000  [QFN-46_CC3000]  96.01,36.07 0 top
U11  LM1117  [SOT223]  102.36,22.1 180 top
U12  74HC4050  [SO016]  92.2,22.1 180 top
U13  CC3000  [QFN-46_CC3000]  18.29,82.3 0 top
U14  LM1117  [SOT223]  24.64,68.33 180 top
U15  74HC4050  [SO016]  14.48,68.33 180 top
U16  CC3000  [QFN-46_CC3000]  44.2,82.3 0 top
U17  LM1117  [SOT223]  50.55,68.33 180 top
U18  74HC4050  [SO016]  40.39,68.33 180 top
U19  CC3000  [QFN-46_CC3000]  70.1,82.3 0 top
U20  LM1117  [SOT223]  76.45,68.33 180 top
U21  74HC4050  [SO016]  66.29,68.33 180 top
U22  CC3000  [QFN-46_CC3000]  96.01,82.3 0 top
U23  LM1117  [SOT223]  102.36,68.33 180 top
U24  74HC4050  [SO016]  92.2,68.33 180 top
U25  CC3000  [QFN-46_CC3000]  18.29,128.52 0 top
U26  LM1117  [SOT223]  24.64,114.55 180 top
U27  74HC4050  [SO016]  14.48,114.55 180 top
U28  CC3000  [QFN-46_CC3000]  44.2,128.52 0 top
U29  LM1117  [SOT223]  50.55,114.55 180 top
U30  74HC4050  [SO016]  40.39,114.55 180 top
U31  CC3000  [QFN-46_CC3000]  70.1,128.52 0 top
U32  LM1117  [SOT223]  76.45,114.55 180 top
U33  74HC4050  [SO016]  66.29,114.55 180 top
U34  CC3000  [QFN-46_CC3000]  96.01,128.52 0 top
U35  LM1117  [SOT223]  102.36,114.55 180 top
U36  74HC4050  [SO016]  92.2,114.55 180 top
U37  CC3000  [QFN-46_CC3000]  121.92,36.07 0 top
U38  LM1117  [SOT223]  128.27,22.1 180 top
U39  74HC4050  [SO016]  118.11,22.1 180 top
U40  CC3000  [QFN-46_CC3000]  121.92,82.3 0 top
U41  LM1117  [SOT223]  128.27,68.33 180 top
U42  74HC4050  [SO016]  118.11,68.33 180 top
U43  CC3000  [QFN-46_CC3000]  121.92,128.52 0 top
U44  LM1117  [SOT223]  128.27,114.55 180 top
U45  74HC4050  [SO016]  118.11,114.55 180 top

## Library data of the parts
AE1-AE15 U2 U5 U7 U10 U13 U16 U19 U22 U25 U28 U31 U34 U37 U40 U43 = SparkFun-RF
C1-C5 C8-C11 C13 C15-C19 C21 C23-C27 C29 C31-C35 C37 C39-C43 C45 C47-C51 C53 C55-C59 C61 C63-C67 C69 C71-C75 C77 C79-C83 C85 C87-C91 C93 C95-C99 C101 C103-C107 C109 C111-C115 C117 C119 C120 = SparkFun-Capacitors
C6 C12 C20 C28 C36 C44 C52 C60 C68 C76 C84 C92 C100 C108 C116 = SparkFun-Capacitors; COEFF: C0G; TOL: 5%
C7 C14 C22 C30 C38 C46 C54 C62 C70 C78 C86 C94 C102 C110 C118 = SparkFun-Capacitors; COEFF: C0G; TOL: 10%
D1-D15 = SparkFun-LED; PROD_ID: DIO-00821
E$1 E$4 E$6 FID1-FID30 LOGO1-LOGO45 = SparkFun-Aesthetics
J1-J15 JP1-JP30 = SparkFun-Connectors
L1-L30 SJ1-SJ15 = SparkFun-Passives
R1-R60 = SparkFun-Resistors
STANDOFF1-STANDOFF30 = SparkFun-Electromechanical
U1 U4 U8 U11 U14 U17 U20 U23 U26 U29 U32 U35 U38 U41 U44 = SparkFun-PowerIC
U3 U6 U9 U12 U15 U18 U21 U24 U27 U30 U33 U36 U39 U42 U45 = SparkFun-DigitalIC

## Nets
3.3V: C2.1 C4.1 C5.1 JP2.7 R1.2 R3.2 R4.2 U1.2 U1.4 U3.1 U5.P$19 U5.P$23
3.3V1: C10.1 C11.1 C16.1 JP4.7 R5.2 R7.2 R8.2 U2.P$19 U2.P$23 U4.2 U4.4 U6.1
3.3V2: C18.1 C19.1 C24.1 JP6.7 R9.2 R11.2 R12.2 U7.P$19 U7.P$23 U8.2 U8.4 U9.1
3.3V3: C26.1 C27.1 C32.1 JP8.7 R13.2 R15.2 R16.2 U10.P$19 U10.P$23 U11.2 U11.4 U12.1
3.3V4: C34.1 C35.1 C40.1 JP10.7 R17.2 R19.2 R20.2 U13.P$19 U13.P$23 U14.2 U14.4 U15.1
3.3V5: C42.1 C43.1 C48.1 JP12.7 R21.2 R23.2 R24.2 U16.P$19 U16.P$23 U17.2 U17.4 U18.1
3.3V6: C50.1 C51.1 C56.1 JP14.7 R25.2 R27.2 R28.2 U19.P$19 U19.P$23 U20.2 U20.4 U21.1
3.3V7: C58.1 C59.1 C64.1 JP16.7 R29.2 R31.2 R32.2 U22.P$19 U22.P$23 U23.2 U23.4 U24.1
3.3V8: C66.1 C67.1 C72.1 JP18.7 R33.2 R35.2 R36.2 U25.P$19 U25.P$23 U26.2 U26.4 U27.1
3.3V9: C74.1 C75.1 C80.1 JP20.7 R37.2 R39.2 R40.2 U28.P$19 U28.P$23 U29.2 U29.4 U30.1
3.3V10: C82.1 C83.1 C88.1 JP22.7 R41.2 R43.2 R44.2 U31.P$19 U31.P$23 U32.2 U32.4 U33.1
3.3V11: C90.1 C91.1 C96.1 JP24.7 R45.2 R47.2 R48.2 U34.P$19 U34.P$23 U35.2 U35.4 U36.1
3.3V12: C98.1 C99.1 C104.1 JP26.7 R49.2 R51.2 R52.2 U37.P$19 U37.P$23 U38.2 U38.4 U39.1
3.3V13: C106.1 C107.1 C112.1 JP28.7 R53.2 R55.2 R56.2 U40.P$19 U40.P$23 U41.2 U41.4 U42.1
3.3V14: C114.1 C115.1 C120.1 JP30.7 R57.2 R59.2 R60.2 U43.P$19 U43.P$23 U44.2 U44.4 U45.1
CS_3.3V: R4.1 U3.12 U5.P$12
CS_3.3V1: R8.1 U2.P$12 U6.12
CS_3.3V2: R12.1 U7.P$12 U9.12
CS_3.3V3: R16.1 U10.P$12 U12.12
CS_3.3V4: R20.1 U13.P$12 U15.12
CS_3.3V5: R24.1 U16.P$12 U18.12
CS_3.3V6: R28.1 U19.P$12 U21.12
CS_3.3V7: R32.1 U22.P$12 U24.12
CS_3.3V8: R36.1 U25.P$12 U27.12
CS_3.3V9: R40.1 U28.P$12 U30.12
CS_3.3V10: R44.1 U31.P$12 U33.12
CS_3.3V11: R48.1 U34.P$12 U36.12
CS_3.3V12: R52.1 U37.P$12 U39.12
CS_3.3V13: R56.1 U40.P$12 U42.12
CS_3.3V14: R60.1 U43.P$12 U45.12
CS_5V: JP2.4 U3.11
CS_5V1: JP4.4 U6.11
CS_5V2: JP6.4 U9.11
CS_5V3: JP8.4 U12.11
CS_5V4: JP10.4 U15.11
CS_5V5: JP12.4 U18.11
CS_5V6: JP14.4 U21.11
CS_5V7: JP16.4 U24.11
CS_5V8: JP18.4 U27.11
CS_5V9: JP20.4 U30.11
CS_5V10: JP22.4 U33.11
CS_5V11: JP24.4 U36.11
CS_5V12: JP26.4 U39.11
CS_5V13: JP28.4 U42.11
CS_5V14: JP30.4 U45.11
EN_3.3V: U3.2 U5.P$26
EN_3.3V1: U2.P$26 U6.2
EN_3.3V2: U7.P$26 U9.2
EN_3.3V3: U10.P$26 U12.2
EN_3.3V4: U13.P$26 U15.2
EN_3.3V5: U16.P$26 U18.2
EN_3.3V6: U19.P$26 U21.2
EN_3.3V7: U22.P$26 U24.2
EN_3.3V8: U25.P$26 U27.2
EN_3.3V9: U28.P$26 U30.2
EN_3.3V10: U31.P$26 U33.2
EN_3.3V11: U34.P$26 U36.2
EN_3.3V12: U37.P$26 U39.2
EN_3.3V13: U40.P$26 U42.2
EN_3.3V14: U43.P$26 U45.2
EN_5V: JP2.1 U3.3
EN_5V1: JP4.1 U6.3
EN_5V2: JP6.1 U9.3
EN_5V3: JP8.1 U12.3
EN_5V4: JP10.1 U15.3
EN_5V5: JP12.1 U18.3
EN_5V6: JP14.1 U21.3
EN_5V7: JP16.1 U24.3
EN_5V8: JP18.1 U27.3
EN_5V9: JP20.1 U30.3
EN_5V10: JP22.1 U33.3
EN_5V11: JP24.1 U36.3
EN_5V12: JP26.1 U39.3
EN_5V13: JP28.1 U42.3
EN_5V14: JP30.1 U45.3
GND: C1.2 C2.2 C3.2 C4.2 C5.2 D1.C J1.P$1 J1.P$2 JP1.3 JP2.9 L1.2 L2.2 R2.1 SJ1.3 U3.8 U5.GND@37 U5.GND@38 U5.GND@39 U5.GND@40 U5.GND@41 U5.GND@42 U5.GND@43 U5.GND@44 U5.GND@45 U5.GND@46 U5.P$1 U5.P$9 U5.P$10 U5.P$11 U5.P$16 U5.P$18 U5.P$20 U5.P$21 U5.P$22 U5.P$25 U5.P$31 U5.P$32 U5.P$33 U5.P$34 U5.P$36
GND1: C9.2 C10.2 C11.2 C15.2 C16.2 D2.C J2.P$1 J2.P$2 JP3.3 JP4.9 L3.2 L4.2 R6.1 SJ2.3 U2.GND@37 U2.GND@38 U2.GND@39 U2.GND@40 U2.GND@41 U2.GND@42 U2.GND@43 U2.GND@44 U2.GND@45 U2.GND@46 U2.P$1 U2.P$9 U2.P$10 U2.P$11 U2.P$16 U2.P$18 U2.P$20 U2.P$21 U2.P$22 U2.P$25 U2.P$31 U2.P$32 U2.P$33 U2.P$34 U2.P$36 U6.8
GND2: C17.2 C18.2 C19.2 C23.2 C24.2 D3.C J3.P$1 J3.P$2 JP5.3 JP6.9 L5.2 L6.2 R10.1 SJ3.3 U7.GND@37 U7.GND@38 U7.GND@39 U7.GND@40 U7.GND@41 U7.GND@42 U7.GND@43 U7.GND@44 U7.GND@45 U7.GND@46 U7.P$1 U7.P$9 U7.P$10 U7.P$11 U7.P$16 U7.P$18 U7.P$20 U7.P$21 U7.P$22 U7.P$25 U7.P$31 U7.P$32 U7.P$33 U7.P$34 U7.P$36 U9.8
GND3: C25.2 C26.2 C27.2 C31.2 C32.2 D4.C J4.P$1 J4.P$2 JP7.3 JP8.9 L7.2 L8.2 R14.1 SJ4.3 U10.GND@37 U10.GND@38 U10.GND@39 U10.GND@40 U10.GND@41 U10.GND@42 U10.GND@43 U10.GND@44 U10.GND@45 U10.GND@46 U10.P$1 U10.P$9 U10.P$10 U10.P$11 U10.P$16 U10.P$18 U10.P$20 U10.P$21 U10.P$22 U10.P$25 U10.P$31 U10.P$32 U10.P$33 U10.P$34 U10.P$36 U12.8
GND4: C33.2 C34.2 C35.2 C39.2 C40.2 D5.C J5.P$1 J5.P$2 JP9.3 JP10.9 L9.2 L10.2 R18.1 SJ5.3 U13.GND@37 U13.GND@38 U13.GND@39 U13.GND@40 U13.GND@41 U13.GND@42 U13.GND@43 U13.GND@44 U13.GND@45 U13.GND@46 U13.P$1 U13.P$9 U13.P$10 U13.P$11 U13.P$16 U13.P$18 U13.P$20 U13.P$21 U13.P$22 U13.P$25 U13.P$31 U13.P$32 U13.P$33 U13.P$34 U13.P$36 U15.8
GND5: C41.2 C42.2 C43.2 C47.2 C48.2 D6.C J6.P$1 J6.P$2 JP11.3 JP12.9 L11.2 L12.2 R22.1 SJ6.3 U16.GND@37 U16.GND@38 U16.GND@39 U16.GND@40 U16.GND@41 U16.GND@42 U16.GND@43 U16.GND@44 U16.GND@45 U16.GND@46 U16.P$1 U16.P$9 U16.P$10 U16.P$11 U16.P$16 U16.P$18 U16.P$20 U16.P$21 U16.P$22 U16.P$25 U16.P$31 U16.P$32 U16.P$33 U16.P$34 U16.P$36 U18.8
GND6: C49.2 C50.2 C51.2 C55.2 C56.2 D7.C J7.P$1 J7.P$2 JP13.3 JP14.9 L13.2 L14.2 R26.1 SJ7.3 U19.GND@37 U19.GND@38 U19.GND@39 U19.GND@40 U19.GND@41 U19.GND@42 U19.GND@43 U19.GND@44 U19.GND@45 U19.GND@46 U19.P$1 U19.P$9 U19.P$10 U19.P$11 U19.P$16 U19.P$18 U19.P$20 U19.P$21 U19.P$22 U19.P$25 U19.P$31 U19.P$32 U19.P$33 U19.P$34 U19.P$36 U21.8
GND7: C57.2 C58.2 C59.2 C63.2 C64.2 D8.C J8.P$1 J8.P$2 JP15.3 JP16.9 L15.2 L16.2 R30.1 SJ8.3 U22.GND@37 U22.GND@38 U22.GND@39 U22.GND@40 U22.GND@41 U22.GND@42 U22.GND@43 U22.GND@44 U22.GND@45 U22.GND@46 U22.P$1 U22.P$9 U22.P$10 U22.P$11 U22.P$16 U22.P$18 U22.P$20 U22.P$21 U22.P$22 U22.P$25 U22.P$31 U22.P$32 U22.P$33 U22.P$34 U22.P$36 U24.8
GND8: C65.2 C66.2 C67.2 C71.2 C72.2 D9.C J9.P$1 J9.P$2 JP17.3 JP18.9 L17.2 L18.2 R34.1 SJ9.3 U25.GND@37 U25.GND@38 U25.GND@39 U25.GND@40 U25.GND@41 U25.GND@42 U25.GND@43 U25.GND@44 U25.GND@45 U25.GND@46 U25.P$1 U25.P$9 U25.P$10 U25.P$11 U25.P$16 U25.P$18 U25.P$20 U25.P$21 U25.P$22 U25.P$25 U25.P$31 U25.P$32 U25.P$33 U25.P$34 U25.P$36 U27.8
GND9: C73.2 C74.2 C75.2 C79.2 C80.2 D10.C J10.P$1 J10.P$2 JP19.3 JP20.9 L19.2 L20.2 R38.1 SJ10.3 U28.GND@37 U28.GND@38 U28.GND@39 U28.GND@40 U28.GND@41 U28.GND@42 U28.GND@43 U28.GND@44 U28.GND@45 U28.GND@46 U28.P$1 U28.P$9 U28.P$10 U28.P$11 U28.P$16 U28.P$18 U28.P$20 U28.P$21 U28.P$22 U28.P$25 U28.P$31 U28.P$32 U28.P$33 U28.P$34 U28.P$36 U30.8
GND10: C81.2 C82.2 C83.2 C87.2 C88.2 D11.C J11.P$1 J11.P$2 JP21.3 JP22.9 L21.2 L22.2 R42.1 SJ11.3 U31.GND@37 U31.GND@38 U31.GND@39 U31.GND@40 U31.GND@41 U31.GND@42 U31.GND@43 U31.GND@44 U31.GND@45 U31.GND@46 U31.P$1 U31.P$9 U31.P$10 U31.P$11 U31.P$16 U31.P$18 U31.P$20 U31.P$21 U31.P$22 U31.P$25 U31.P$31 U31.P$32 U31.P$33 U31.P$34 U31.P$36 U33.8
GND11: C89.2 C90.2 C91.2 C95.2 C96.2 D12.C J12.P$1 J12.P$2 JP23.3 JP24.9 L23.2 L24.2 R46.1 SJ12.3 U34.GND@37 U34.GND@38 U34.GND@39 U34.GND@40 U34.GND@41 U34.GND@42 U34.GND@43 U34.GND@44 U34.GND@45 U34.GND@46 U34.P$1 U34.P$9 U34.P$10 U34.P$11 U34.P$16 U34.P$18 U34.P$20 U34.P$21 U34.P$22 U34.P$25 U34.P$31 U34.P$32 U34.P$33 U34.P$34 U34.P$36 U36.8
GND12: C97.2 C98.2 C99.2 C103.2 C104.2 D13.C J13.P$1 J13.P$2 JP25.3 JP26.9 L25.2 L26.2 R50.1 SJ13.3 U37.GND@37 U37.GND@38 U37.GND@39 U37.GND@40 U37.GND@41 U37.GND@42 U37.GND@43 U37.GND@44 U37.GND@45 U37.GND@46 U37.P$1 U37.P$9 U37.P$10 U37.P$11 U37.P$16 U37.P$18 U37.P$20 U37.P$21 U37.P$22 U37.P$25 U37.P$31 U37.P$32 U37.P$33 U37.P$34 U37.P$36 U39.8
GND13: C105.2 C106.2 C107.2 C111.2 C112.2 D14.C J14.P$1 J14.P$2 JP27.3 JP28.9 L27.2 L28.2 R54.1 SJ14.3 U40.GND@37 U40.GND@38 U40.GND@39 U40.GND@40 U40.GND@41 U40.GND@42 U40.GND@43 U40.GND@44 U40.GND@45 U40.GND@46 U40.P$1 U40.P$9 U40.P$10 U40.P$11 U40.P$16 U40.P$18 U40.P$20 U40.P$21 U40.P$22 U40.P$25 U40.P$31 U40.P$32 U40.P$33 U40.P$34 U40.P$36 U42.8
GND14: C113.2 C114.2 C115.2 C119.2 C120.2 D15.C J15.P$1 J15.P$2 JP29.3 JP30.9 L29.2 L30.2 R58.1 SJ15.3 U43.GND@37 U43.GND@38 U43.GND@39 U43.GND@40 U43.GND@41 U43.GND@42 U43.GND@43 U43.GND@44 U43.GND@45 U43.GND@46 U43.P$1 U43.P$9 U43.P$10 U43.P$11 U43.P$16 U43.P$18 U43.P$20 U43.P$21 U43.P$22 U43.P$25 U43.P$31 U43.P$32 U43.P$33 U43.P$34 U43.P$36 U45.8
INT_3.3V: JP2.3 U5.P$14
INT_3.3V1: JP4.3 U2.P$14
INT_3.3V2: JP6.3 U7.P$14
INT_3.3V3: JP8.3 U10.P$14
INT_3.3V4: JP10.3 U13.P$14
INT_3.3V5: JP12.3 U16.P$14
INT_3.3V6: JP14.3 U19.P$14
INT_3.3V7: JP16.3 U22.P$14
INT_3.3V8: JP18.3 U25.P$14
INT_3.3V9: JP20.3 U28.P$14
INT_3.3V10: JP22.3 U31.P$14
INT_3.3V11: JP24.3 U34.P$14
INT_3.3V12: JP26.3 U37.P$14
INT_3.3V13: JP28.3 U40.P$14
INT_3.3V14: JP30.3 U43.P$14
MISO_3.3V: JP2.5 U5.P$13
MISO_3.3V1: JP4.5 U2.P$13
MISO_3.3V2: JP6.5 U7.P$13
MISO_3.3V3: JP8.5 U10.P$13
MISO_3.3V4: JP10.5 U13.P$13
MISO_3.3V5: JP12.5 U16.P$13
MISO_3.3V6: JP14.5 U19.P$13
MISO_3.3V7: JP16.5 U22.P$13
MISO_3.3V8: JP18.5 U25.P$13
MISO_3.3V9: JP20.5 U28.P$13
MISO_3.3V10: JP22.5 U31.P$13
MISO_3.3V11: JP24.5 U34.P$13
MISO_3.3V12: JP26.5 U37.P$13
MISO_3.3V13: JP28.5 U40.P$13
MISO_3.3V14: JP30.5 U43.P$13
MOSI_3.3V: U3.6 U5.P$15
MOSI_3.3V1: U2.P$15 U6.6
MOSI_3.3V2: U7.P$15 U9.6
MOSI_3.3V3: U10.P$15 U12.6
MOSI_3.3V4: U13.P$15 U15.6
MOSI_3.3V5: U16.P$15 U18.6
MOSI_3.3V6: U19.P$15 U21.6
MOSI_3.3V7: U22.P$15 U24.6
MOSI_3.3V8: U25.P$15 U27.6
MOSI_3.3V9: U28.P$15 U30.6
MOSI_3.3V10: U31.P$15 U33.6
MOSI_3.3V11: U34.P$15 U36.6
MOSI_3.3V12: U37.P$15 U39.6
MOSI_3.3V13: U40.P$15 U42.6
MOSI_3.3V14: U43.P$15 U45.6
MOSI_5V: JP2.6 U3.7
MOSI_5V1: JP4.6 U6.7
MOSI_5V2: JP6.6 U9.7
MOSI_5V3: JP8.6 U12.7
MOSI_5V4: JP10.6 U15.7
MOSI_5V5: JP12.6 U18.7
MOSI_5V6: JP14.6 U21.7
MOSI_5V7: JP16.6 U24.7
MOSI_5V8: JP18.6 U27.7
MOSI_5V9: JP20.6 U30.7
MOSI_5V10: JP22.6 U33.7
MOSI_5V11: JP24.6 U36.7
MOSI_5V12: JP26.6 U39.7
MOSI_5V13: JP28.6 U42.7
MOSI_5V14: JP30.6 U45.7
N$2: R1.1 R2.2 U1.1
N$3: SJ1.2 U5.P$5
N$4: SJ1.1 U5.P$7
N$5: C6.1 C7.2 L2.1
N$6: U5.P$27 U5.P$28
N$7: U5.P$29 U5.P$30
N$8: C6.2 C8.1 U5.P$35
N$9: C8.2 J1.P$3
N$10: AE1.FEED C7.1 L1.1
N$11: D1.A R3.1
N$17: R5.1 R6.2 U4.1
N$18: SJ2.2 U2.P$5
N$19: SJ2.1 U2.P$7
N$35: U2.P$27 U2.P$28
N$36: U2.P$29 U2.P$30
N$37: C12.1 C14.2 L4.1
N$38: AE2.FEED C14.1 L3.1
N$39: C13.2 J2.P$3
N$40: D2.A R7.1
N$41: C12.2 C13.1 U2.P$35
N$42: R9.1 R10.2 U8.1
N$43: SJ3.2 U7.P$5
N$44: SJ3.1 U7.P$7
N$45: U7.P$27 U7.P$28
N$46: U7.P$29 U7.P$30
N$47: C20.1 C22.2 L6.1
N$48: AE3.FEED C22.1 L5.1
N$49: C21.2 J3.P$3
N$50: D3.A R11.1
N$51: C20.2 C21.1 U7.P$35
N$52: R13.1 R14.2 U11.1
N$53: SJ4.2 U10.P$5
N$54: SJ4.1 U10.P$7
N$55: U10.P$27 U10.P$28
N$56: U10.P$29 U10.P$30
N$57: C28.1 C30.2 L8.1
N$58: AE4.FEED C30.1 L7.1
N$59: C29.2 J4.P$3
N$60: D4.A R15.1
N$61: C28.2 C29.1 U10.P$35
N$62: R17.1 R18.2 U14.1
N$63: SJ5.2 U13.P$5
N$64: SJ5.1 U13.P$7
N$65: U13.P$27 U13.P$28
N$66: U13.P$29 U13.P$30
N$67: C36.1 C38.2 L10.1
N$68: AE5.FEED C38.1 L9.1
N$69: C37.2 J5.P$3
N$70: D5.A R19.1
N$71: C36.2 C37.1 U13.P$35
N$72: R21.1 R22.2 U17.1
N$73: SJ6.2 U16.P$5
N$75: SJ6.1 U16.P$7
N$76: U16.P$27 U16.P$28
N$77: U16.P$29 U16.P$30
N$78: C44.1 C46.2 L12.1
N$79: AE6.FEED C46.1 L11.1
N$80: C45.2 J6.P$3
N$81: D6.A R23.1
N$82: C44.2 C45.1 U16.P$35
N$83: R25.1 R26.2 U20.1
N$84: SJ7.2 U19.P$5
N$85: SJ7.1 U19.P$7
N$86: U19.P$27 U19.P$28
N$87: U19.P$29 U19.P$30
N$88: C52.1 C54.2 L14.1
N$89: AE7.FEED C54.1 L13.1
N$90: C53.2 J7.P$3
N$91: D7.A R27.1
N$92: C52.2 C53.1 U19.P$35
N$93: R29.1 R30.2 U23.1
N$94: SJ8.2 U22.P$5
N$95: SJ8.1 U22.P$7
N$96: U22.P$27 U22.P$28
N$99: U22.P$29 U22.P$30
N$100: C60.1 C62.2 L16.1
N$103: AE8.FEED C62.1 L15.1
N$104: C61.2 J8.P$3
N$107: D8.A R31.1
N$108: C60.2 C61.1 U22.P$35
N$111: R33.1 R34.2 U26.1
N$112: SJ9.2 U25.P$5
N$115: SJ9.1 U25.P$7
N$116: U25.P$27 U25.P$28
N$125: U25.P$29 U25.P$30
N$126: C68.1 C70.2 L18.1
N$127: AE9.FEED C70.1 L17.1
N$128: C69.2 J9.P$3
N$129: D9.A R35.1
N$130: C68.2 C69.1 U25.P$35
N$131: R37.1 R38.2 U29.1
N$132: SJ10.2 U28.P$5
N$133: SJ10.1 U28.P$7
N$134: U28.P$27 U28.P$28
N$135: U28.P$29 U28.P$30
N$136: C76.1 C78.2 L20.1
N$137: AE10.FEED C78.1 L19.1
N$138: C77.2 J10.P$3
N$139: D10.A R39.1
N$140: C76.2 C77.1 U28.P$35
N$141: R41.1 R42.2 U32.1
N$142: SJ11.2 U31.P$5
N$143: SJ11.1 U31.P$7
N$144: U31.P$27 U31.P$28
N$145: U31.P$29 U31.P$30
N$146: C84.1 C86.2 L22.1
N$147: AE11.FEED C86.1 L21.1
N$148: C85.2 J11.P$3
N$149: D11.A R43.1
N$150: C84.2 C85.1 U31.P$35
N$151: R45.1 R46.2 U35.1
N$152: SJ12.2 U34.P$5
N$153: SJ12.1 U34.P$7
N$154: U34.P$27 U34.P$28
N$155: U34.P$29 U34.P$30
N$156: C92.1 C94.2 L24.1
N$157: AE12.FEED C94.1 L23.1
N$158: C93.2 J12.P$3
N$159: D12.A R47.1
N$160: C92.2 C93.1 U34.P$35
N$161: R49.1 R50.2 U38.1
N$162: SJ13.2 U37.P$5
N$163: SJ13.1 U37.P$7
N$164: U37.P$27 U37.P$28
N$165: U37.P$29 U37.P$30
N$166: C100.1 C102.2 L26.1
N$167: AE13.FEED C102.1 L25.1
N$168: C101.2 J13.P$3
N$169: D13.A R51.1
N$170: C100.2 C101.1 U37.P$35
N$171: R53.1 R54.2 U41.1
N$172: SJ14.2 U40.P$5
N$173: SJ14.1 U40.P$7
N$174: U40.P$27 U40.P$28
N$175: U40.P$29 U40.P$30
N$176: C108.1 C110.2 L28.1
N$177: AE14.FEED C110.1 L27.1
N$178: C109.2 J14.P$3
N$179: D14.A R55.1
N$180: C108.2 C109.1 U40.P$35
N$181: R57.1 R58.2 U44.1
N$182: SJ15.2 U43.P$5
N$183: SJ15.1 U43.P$7
N$184: U43.P$27 U43.P$28
N$185: U43.P$29 U43.P$30
N$186: C116.1 C118.2 L30.1
N$187: AE15.FEED C118.1 L29.1
N$188: C117.2 J15.P$3
N$189: D15.A R59.1
N$190: C116.2 C117.1 U43.P$35
SCK_3.3V: U3.4 U5.P$17
SCK_3.3V1: U2.P$17 U6.4
SCK_3.3V2: U7.P$17 U9.4
SCK_3.3V3: U10.P$17 U12.4
SCK_3.3V4: U13.P$17 U15.4
SCK_3.3V5: U16.P$17 U18.4
SCK_3.3V6: U19.P$17 U21.4
SCK_3.3V7: U22.P$17 U24.4
SCK_3.3V8: U25.P$17 U27.4
SCK_3.3V9: U28.P$17 U30.4
SCK_3.3V10: U31.P$17 U33.4
SCK_3.3V11: U34.P$17 U36.4
SCK_3.3V12: U37.P$17 U39.4
SCK_3.3V13: U40.P$17 U42.4
SCK_3.3V14: U43.P$17 U45.4
SCK_5V: JP2.2 U3.5
SCK_5V1: JP4.2 U6.5
SCK_5V2: JP6.2 U9.5
SCK_5V3: JP8.2 U12.5
SCK_5V4: JP10.2 U15.5
SCK_5V5: JP12.2 U18.5
SCK_5V6: JP14.2 U21.5
SCK_5V7: JP16.2 U24.5
SCK_5V8: JP18.2 U27.5
SCK_5V9: JP20.2 U30.5
SCK_5V10: JP22.2 U33.5
SCK_5V11: JP24.2 U36.5
SCK_5V12: JP26.2 U39.5
SCK_5V13: JP28.2 U42.5
SCK_5V14: JP30.2 U45.5
VCC: C1.1 C3.1 JP2.8 U1.3
VCC1: C9.1 C15.1 JP4.8 U4.3
VCC2: C17.1 C23.1 JP6.8 U8.3
VCC3: C25.1 C31.1 JP8.8 U11.3
VCC4: C33.1 C39.1 JP10.8 U14.3
VCC5: C41.1 C47.1 JP12.8 U17.3
VCC6: C49.1 C55.1 JP14.8 U20.3
VCC7: C57.1 C63.1 JP16.8 U23.3
VCC8: C65.1 C71.1 JP18.8 U26.3
VCC9: C73.1 C79.1 JP20.8 U29.3
VCC10: C81.1 C87.1 JP22.8 U32.3
VCC11: C89.1 C95.1 JP24.8 U35.3
VCC12: C97.1 C103.1 JP26.8 U38.3
VCC13: C105.1 C111.1 JP28.8 U41.3
VCC14: C113.1 C119.1 JP30.8 U44.3
WIFI_RX: JP1.2 U5.P$8
WIFI_RX1: JP3.2 U2.P$8
WIFI_RX2: JP5.2 U7.P$8
WIFI_RX3: JP7.2 U10.P$8
WIFI_RX4: JP9.2 U13.P$8
WIFI_RX5: JP11.2 U16.P$8
WIFI_RX6: JP13.2 U19.P$8
WIFI_RX7: JP15.2 U22.P$8
WIFI_RX8: JP17.2 U25.P$8
WIFI_RX9: JP19.2 U28.P$8
WIFI_RX10: JP21.2 U31.P$8
WIFI_RX11: JP23.2 U34.P$8
WIFI_RX12: JP25.2 U37.P$8
WIFI_RX13: JP27.2 U40.P$8
WIFI_RX14: JP29.2 U43.P$8
WIFI_TX: JP1.1 U5.P$6
WIFI_TX1: JP3.1 U2.P$6
WIFI_TX2: JP5.1 U7.P$6
WIFI_TX3: JP7.1 U10.P$6
WIFI_TX4: JP9.1 U13.P$6
WIFI_TX5: JP11.1 U16.P$6
WIFI_TX6: JP13.1 U19.P$6
WIFI_TX7: JP15.1 U22.P$6
WIFI_TX8: JP17.1 U25.P$6
WIFI_TX9: JP19.1 U28.P$6
WIFI_TX10: JP21.1 U31.P$6
WIFI_TX11: JP23.1 U34.P$6
WIFI_TX12: JP25.1 U37.P$6
WIFI_TX13: JP27.1 U40.P$6
WIFI_TX14: JP29.1 U43.P$6

## Tracks (layer width: path | path; a pad name or v marks a point on that pad's centre or on a via)
3.3V  (via drill 0.51)
  Top 0.254: R4.2 14.64,14.9 v12.7,12.95
  Top 0.508: U5.P$23 25.82,35.47 25.91,35.56 | U5.P$19 25.84,30.67 25.91,30.73 | 26.16,32.26 25.91,32.51 | U3.1 19.81,24.9 v20.57,24.13
  Top 0.762: 25.91,26.92 25.91,30.73 25.91,32.51 25.91,34.8 | 25.91,34.8 25.91,35.56 25.91,36.83 26.42,37.34 R3.2 | C5.1 25.91,34.8 | R1.2 26.16,32.26 | C2.1 C4.1 24.88,21.73 24.64,21.97 U1.2 | v27.2,18.29 27.18,18.26 27.18,16.51 22.35,11.68 18.03,11.68 JP2.7
  Bottom 0.254: JP2.7 12.7,9.91 v12.7,12.95
  Bottom 0.508: v20.57,24.13 20.57,23.11 v22.35,21.34
  other vias: 26.92,22.86 26.92,21.34 24.64,22.86 24.64,21.34 27.2,19.81 22.07,18.29 22.07,19.81
  pour Top (isolate 0.305): 23.11,26.92 28.45,26.92 28.45,17.78 21.59,17.78 21.59,21.59 23.11,23.11
  pour Bottom (isolate 0.305): 23.11,26.92 28.45,26.92 28.45,17.78 21.59,17.78 21.59,21.59 23.11,23.11
3.3V1  (via drill 0.51)
  Top 0.254: R8.2 40.55,14.9 v38.61,12.95
  Top 0.508: U2.P$23 51.72,35.47 51.82,35.56 | U2.P$19 51.75,30.67 51.82,30.73 | 52.07,32.26 51.82,32.51 | U6.1 45.71,24.9 v46.48,24.13
  Top 0.762: 51.82,26.92 51.82,30.73 51.82,32.51 51.82,34.8 | 51.82,34.8 51.82,35.56 51.82,36.83 52.32,37.34 R7.2 | C11.1 51.82,34.8 | R5.2 52.07,32.26 | C16.1 C10.1 50.79,21.73 50.55,21.97 U4.2 | v53.11,18.29 53.09,18.26 53.09,16.51 48.26,11.68 43.94,11.68 JP4.7
  Bottom 0.254: JP4.7 38.61,9.91 v38.61,12.95
  Bottom 0.508: v46.48,24.13 46.48,23.11 v48.26,21.34
  other vias: 52.83,22.86 52.83,21.34 50.55,22.86 50.55,21.34 53.11,19.81 47.98,18.29 47.98,19.81
  pour Top (isolate 0.305): 49.02,26.92 54.36,26.92 54.36,17.78 47.5,17.78 47.5,21.59 49.02,23.11
  pour Bottom (isolate 0.305): 49.02,26.92 54.36,26.92 54.36,17.78 47.5,17.78 47.5,21.59 49.02,23.11
3.3V2  (via drill 0.51)
  Top 0.254: R12.2 66.46,14.9 v64.52,12.95
  Top 0.508: U7.P$23 77.63,35.47 77.72,35.56 | U7.P$19 77.66,30.67 77.72,30.73 | 77.98,32.26 77.72,32.51 | U9.1 71.62,24.9 v72.39,24.13
  Top 0.762: 77.72,26.92 77.72,30.73 77.72,32.51 77.72,34.8 | 77.72,34.8 77.72,35.56 77.72,36.83 78.23,37.34 R11.2 | C19.1 77.72,34.8 | R9.2 77.98,32.26 | C24.1 C18.1 76.7,21.73 76.45,21.97 U8.2 | v79.02,18.29 78.99,18.26 78.99,16.51 74.17,11.68 69.85,11.68 JP6.7
  Bottom 0.254: JP6.7 64.52,9.91 v64.52,12.95
  Bottom 0.508: v72.39,24.13 72.39,23.11 v74.17,21.34
  other vias: 78.74,22.86 78.74,21.34 76.45,22.86 76.45,21.34 79.02,19.81 73.89,18.29 73.89,19.81
  pour Top (isolate 0.305): 74.93,26.92 80.26,26.92 80.26,17.78 73.41,17.78 73.41,21.59 74.93,23.11
  pour Bottom (isolate 0.305): 74.93,26.92 80.26,26.92 80.26,17.78 73.41,17.78 73.41,21.59 74.93,23.11
3.3V3  (via drill 0.51)
  Top 0.254: R16.2 92.37,14.9 v90.42,12.95
  Top 0.508: U10.P$23 103.54,35.47 103.63,35.56 | U10.P$19 103.57,30.67 103.63,30.73 | 103.89,32.26 103.63,32.51 | U12.1 97.53,24.9 v98.3,24.13
  Top 0.762: 103.63,26.92 103.63,30.73 103.63,32.51 103.63,34.8 | 103.63,34.8 103.63,35.56 103.63,36.83 104.14,37.34 R15.2 | C27.1 103.63,34.8 | R13.2 103.89,32.26 | C32.1 C26.1 102.61,21.73 102.36,21.97 U11.2 | v104.93,18.29 104.9,18.26 104.9,16.51 100.08,11.68 95.76,11.68 JP8.7
  Bottom 0.254: JP8.7 90.42,9.91 v90.42,12.95
  Bottom 0.508: v98.3,24.13 98.3,23.11 v100.08,21.34
  other vias: 104.65,22.86 104.65,21.34 102.36,22.86 102.36,21.34 104.93,19.81 99.8,18.29 99.8,19.81
  pour Top (isolate 0.305): 100.84,26.92 106.17,26.92 106.17,17.78 99.31,17.78 99.31,21.59 100.84,23.11
  pour Bottom (isolate 0.305): 100.84,26.92 106.17,26.92 106.17,17.78 99.31,17.78 99.31,21.59 100.84,23.11
3.3V4  (via drill 0.51)
  Top 0.254: R20.2 14.64,61.13 v12.7,59.18
  Top 0.508: U13.P$23 25.82,81.7 25.91,81.79 | U13.P$19 25.84,76.9 25.91,76.96 | 26.16,78.49 25.91,78.74 | U15.1 19.81,71.13 v20.57,70.36
  Top 0.762: 25.91,73.15 25.91,76.96 25.91,78.74 25.91,81.03 | 25.91,81.03 25.91,81.79 25.91,83.06 26.42,83.57 R19.2 | C35.1 25.91,81.03 | R17.2 26.16,78.49 | C40.1 C34.1 24.88,67.96 24.64,68.2 U14.2 | v27.2,64.52 27.18,64.49 27.18,62.74 22.35,57.91 18.03,57.91 JP10.7
  Bottom 0.254: JP10.7 12.7,56.13 v12.7,59.18
  Bottom 0.508: v20.57,70.36 20.57,69.34 v22.35,67.56
  other vias: 26.92,69.09 26.92,67.56 24.64,69.09 24.64,67.56 27.2,66.04 22.07,64.52 22.07,66.04
  pour Top (isolate 0.305): 23.11,73.15 28.45,73.15 28.45,64.01 21.59,64.01 21.59,67.82 23.11,69.34
  pour Bottom (isolate 0.305): 23.11,73.15 28.45,73.15 28.45,64.01 21.59,64.01 21.59,67.82 23.11,69.34
3.3V5  (via drill 0.51)
  Top 0.254: R24.2 40.55,61.13 v38.61,59.18
  Top 0.508: U16.P$23 51.72,81.7 51.82,81.79 | U16.P$19 51.75,76.9 51.82,76.96 | 52.07,78.49 51.82,78.74 | U18.1 45.71,71.13 v46.48,70.36
  Top 0.762: 51.82,73.15 51.82,76.96 51.82,78.74 51.82,81.03 | 51.82,81.03 51.82,81.79 51.82,83.06 52.32,83.57 R23.2 | C43.1 51.82,81.03 | R21.2 52.07,78.49 | C48.1 C42.1 50.79,67.96 50.55,68.2 U17.2 | v53.11,64.52 53.09,64.49 53.09,62.74 48.26,57.91 43.94,57.91 JP12.7
  Bottom 0.254: JP12.7 38.61,56.13 v38.61,59.18
  Bottom 0.508: v46.48,70.36 46.48,69.34 v48.26,67.56
  other vias: 52.83,69.09 52.83,67.56 50.55,69.09 50.55,67.56 53.11,66.04 47.98,64.52 47.98,66.04
  pour Top (isolate 0.305): 49.02,73.15 54.36,73.15 54.36,64.01 47.5,64.01 47.5,67.82 49.02,69.34
  pour Bottom (isolate 0.305): 49.02,73.15 54.36,73.15 54.36,64.01 47.5,64.01 47.5,67.82 49.02,69.34
3.3V6  (via drill 0.51)
  Top 0.254: R28.2 66.46,61.13 v64.52,59.18
  Top 0.508: U19.P$23 77.63,81.7 77.72,81.79 | U19.P$19 77.66,76.9 77.72,76.96 | 77.98,78.49 77.72,78.74 | U21.1 71.62,71.13 v72.39,70.36
  Top 0.762: 77.72,73.15 77.72,76.96 77.72,78.74 77.72,81.03 | 77.72,81.03 77.72,81.79 77.72,83.06 78.23,83.57 R27.2 | C51.1 77.72,81.03 | R25.2 77.98,78.49 | C56.1 C50.1 76.7,67.96 76.45,68.2 U20.2 | v79.02,64.52 78.99,64.49 78.99,62.74 74.17,57.91 69.85,57.91 JP14.7
  Bottom 0.254: JP14.7 64.52,56.13 v64.52,59.18
  Bottom 0.508: v72.39,70.36 72.39,69.34 v74.17,67.56
  other vias: 78.74,69.09 78.74,67.56 76.45,69.09 76.45,67.56 79.02,66.04 73.89,64.52 73.89,66.04
  pour Top (isolate 0.305): 74.93,73.15 80.26,73.15 80.26,64.01 73.41,64.01 73.41,67.82 74.93,69.34
  pour Bottom (isolate 0.305): 74.93,73.15 80.26,73.15 80.26,64.01 73.41,64.01 73.41,67.82 74.93,69.34
3.3V7  (via drill 0.51)
  Top 0.254: R32.2 92.37,61.13 v90.42,59.18
  Top 0.508: U22.P$23 103.54,81.7 103.63,81.79 | U22.P$19 103.57,76.9 103.63,76.96 | 103.89,78.49 103.63,78.74 | U24.1 97.53,71.13 v98.3,70.36
  Top 0.762: 103.63,73.15 103.63,76.96 103.63,78.74 103.63,81.03 | 103.63,81.03 103.63,81.79 103.63,83.06 104.14,83.57 R31.2 | C59.1 103.63,81.03 | R29.2 103.89,78.49 | C64.1 C58.1 102.61,67.96 102.36,68.2 U23.2 | v104.93,64.52 104.9,64.49 104.9,62.74 100.08,57.91 95.76,57.91 JP16.7
  Bottom 0.254: JP16.7 90.42,56.13 v90.42,59.18
  Bottom 0.508: v98.3,70.36 98.3,69.34 v100.08,67.56
  other vias: 104.65,69.09 104.65,67.56 102.36,69.09 102.36,67.56 104.93,66.04 99.8,64.52 99.8,66.04
  pour Top (isolate 0.305): 100.84,73.15 106.17,73.15 106.17,64.01 99.31,64.01 99.31,67.82 100.84,69.34
  pour Bottom (isolate 0.305): 100.84,73.15 106.17,73.15 106.17,64.01 99.31,64.01 99.31,67.82 100.84,69.34
3.3V8  (via drill 0.51)
  Top 0.254: R36.2 14.64,107.35 v12.7,105.41
  Top 0.508: U25.P$23 25.82,127.92 25.91,128.02 | U25.P$19 25.84,123.12 25.91,123.19 | 26.16,124.71 25.91,124.97 | U27.1 19.81,117.35 v20.57,116.59
  Top 0.762: 25.91,119.38 25.91,123.19 25.91,124.97 25.91,127.25 | 25.91,127.25 25.91,128.02 25.91,129.29 26.42,129.79 R35.2 | C67.1 25.91,127.25 | R33.2 26.16,124.71 | C72.1 C66.1 24.88,114.18 24.64,114.43 U26.2 | v27.2,110.74 27.18,110.72 27.18,108.97 22.35,104.14 18.03,104.14 JP18.7
  Bottom 0.254: JP18.7 12.7,102.36 v12.7,105.41
  Bottom 0.508: v20.57,116.59 20.57,115.57 v22.35,113.79
  other vias: 26.92,115.32 26.92,113.79 24.64,115.32 24.64,113.79 27.2,112.27 22.07,110.74 22.07,112.27
  pour Top (isolate 0.305): 23.11,119.38 28.45,119.38 28.45,110.24 21.59,110.24 21.59,114.05 23.11,115.57
  pour Bottom (isolate 0.305): 23.11,119.38 28.45,119.38 28.45,110.24 21.59,110.24 21.59,114.05 23.11,115.57
3.3V9  (via drill 0.51)
  Top 0.254: R40.2 40.55,107.35 v38.61,105.41
  Top 0.508: U28.P$23 51.72,127.92 51.82,128.02 | U28.P$19 51.75,123.12 51.82,123.19 | 52.07,124.71 51.82,124.97 | U30.1 45.71,117.35 v46.48,116.59
  Top 0.762: 51.82,119.38 51.82,123.19 51.82,124.97 51.82,127.25 | 51.82,127.25 51.82,128.02 51.82,129.29 52.32,129.79 R39.2 | C75.1 51.82,127.25 | R37.2 52.07,124.71 | C80.1 C74.1 50.79,114.18 50.55,114.43 U29.2 | v53.11,110.74 53.09,110.72 53.09,108.97 48.26,104.14 43.94,104.14 JP20.7
  Bottom 0.254: JP20.7 38.61,102.36 v38.61,105.41
  Bottom 0.508: v46.48,116.59 46.48,115.57 v48.26,113.79
  other vias: 52.83,115.32 52.83,113.79 50.55,115.32 50.55,113.79 53.11,112.27 47.98,110.74 47.98,112.27
  pour Top (isolate 0.305): 49.02,119.38 54.36,119.38 54.36,110.24 47.5,110.24 47.5,114.05 49.02,115.57
  pour Bottom (isolate 0.305): 49.02,119.38 54.36,119.38 54.36,110.24 47.5,110.24 47.5,114.05 49.02,115.57
3.3V10  (via drill 0.51)
  Top 0.254: R44.2 66.46,107.35 v64.52,105.41
  Top 0.508: U31.P$23 77.63,127.92 77.72,128.02 | U31.P$19 77.66,123.12 77.72,123.19 | 77.98,124.71 77.72,124.97 | U33.1 71.62,117.35 v72.39,116.59